# Allegro board TKA13_CORE_BOARD.brd
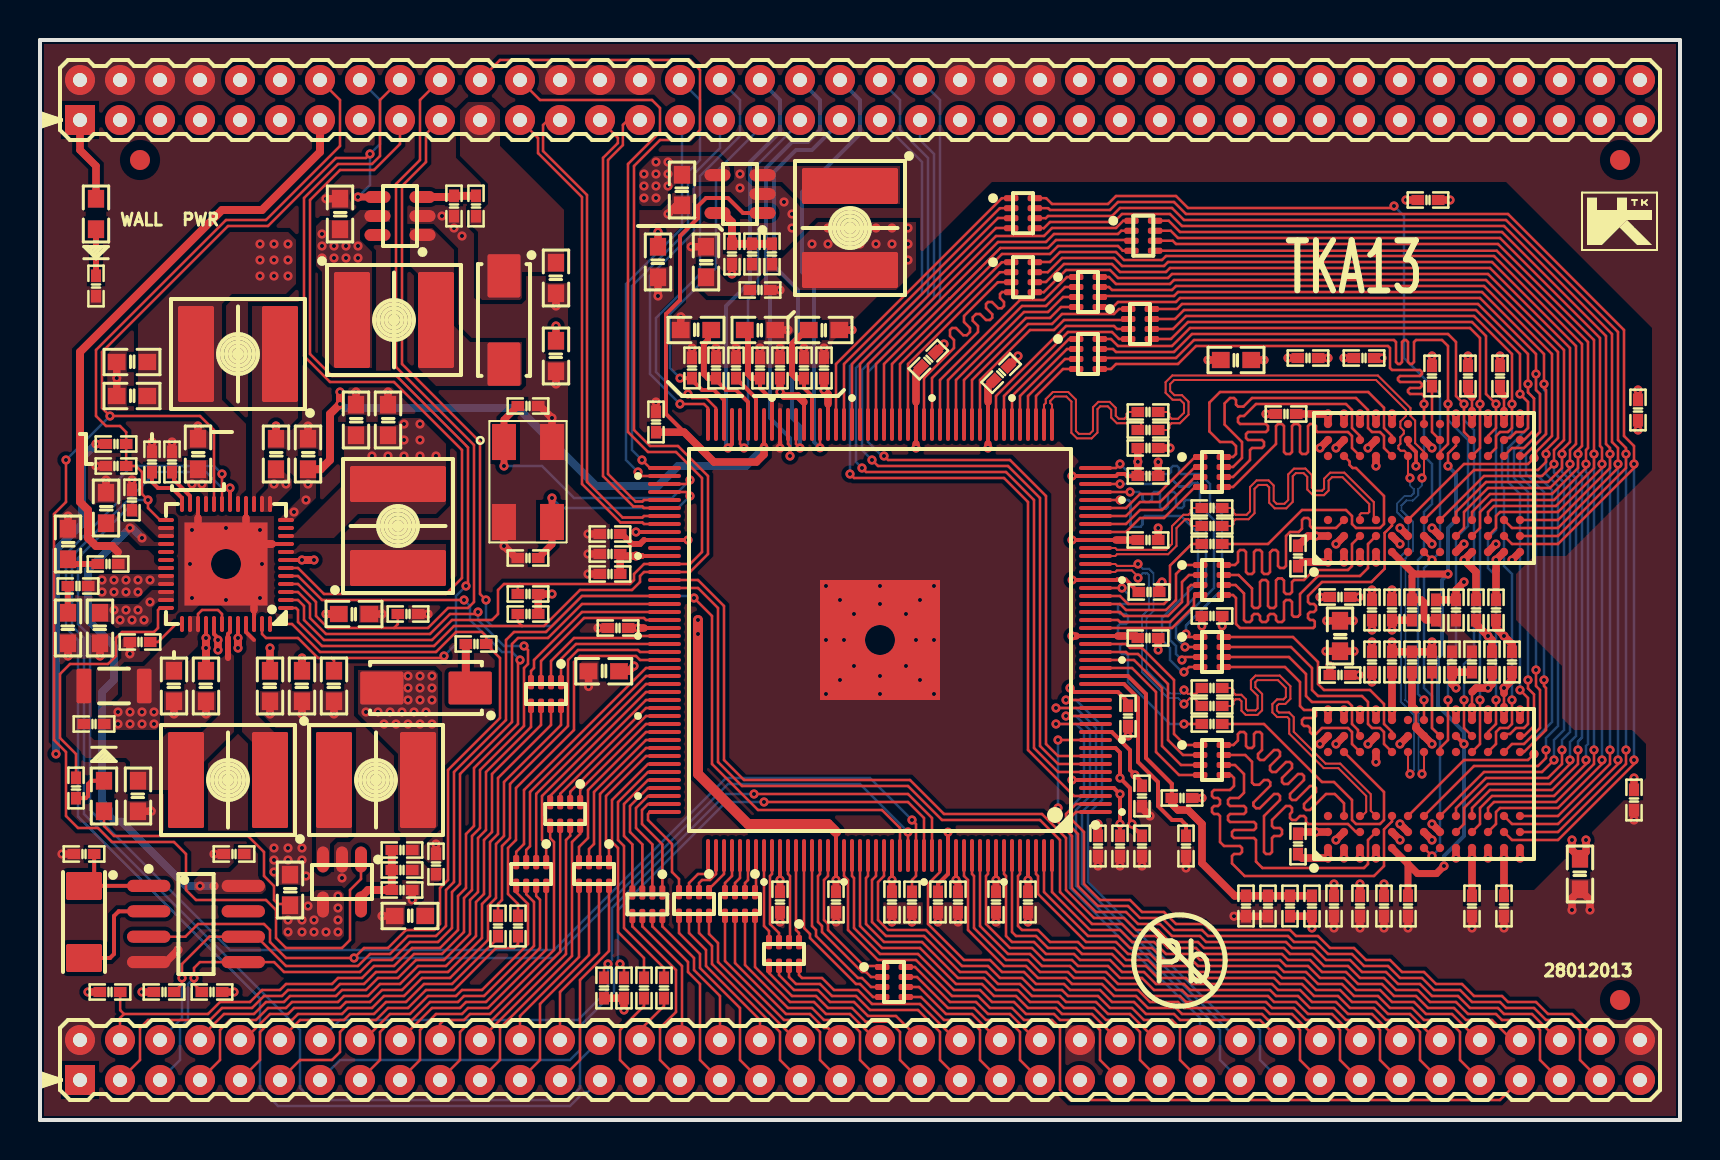
[diagram p0: board, top side]
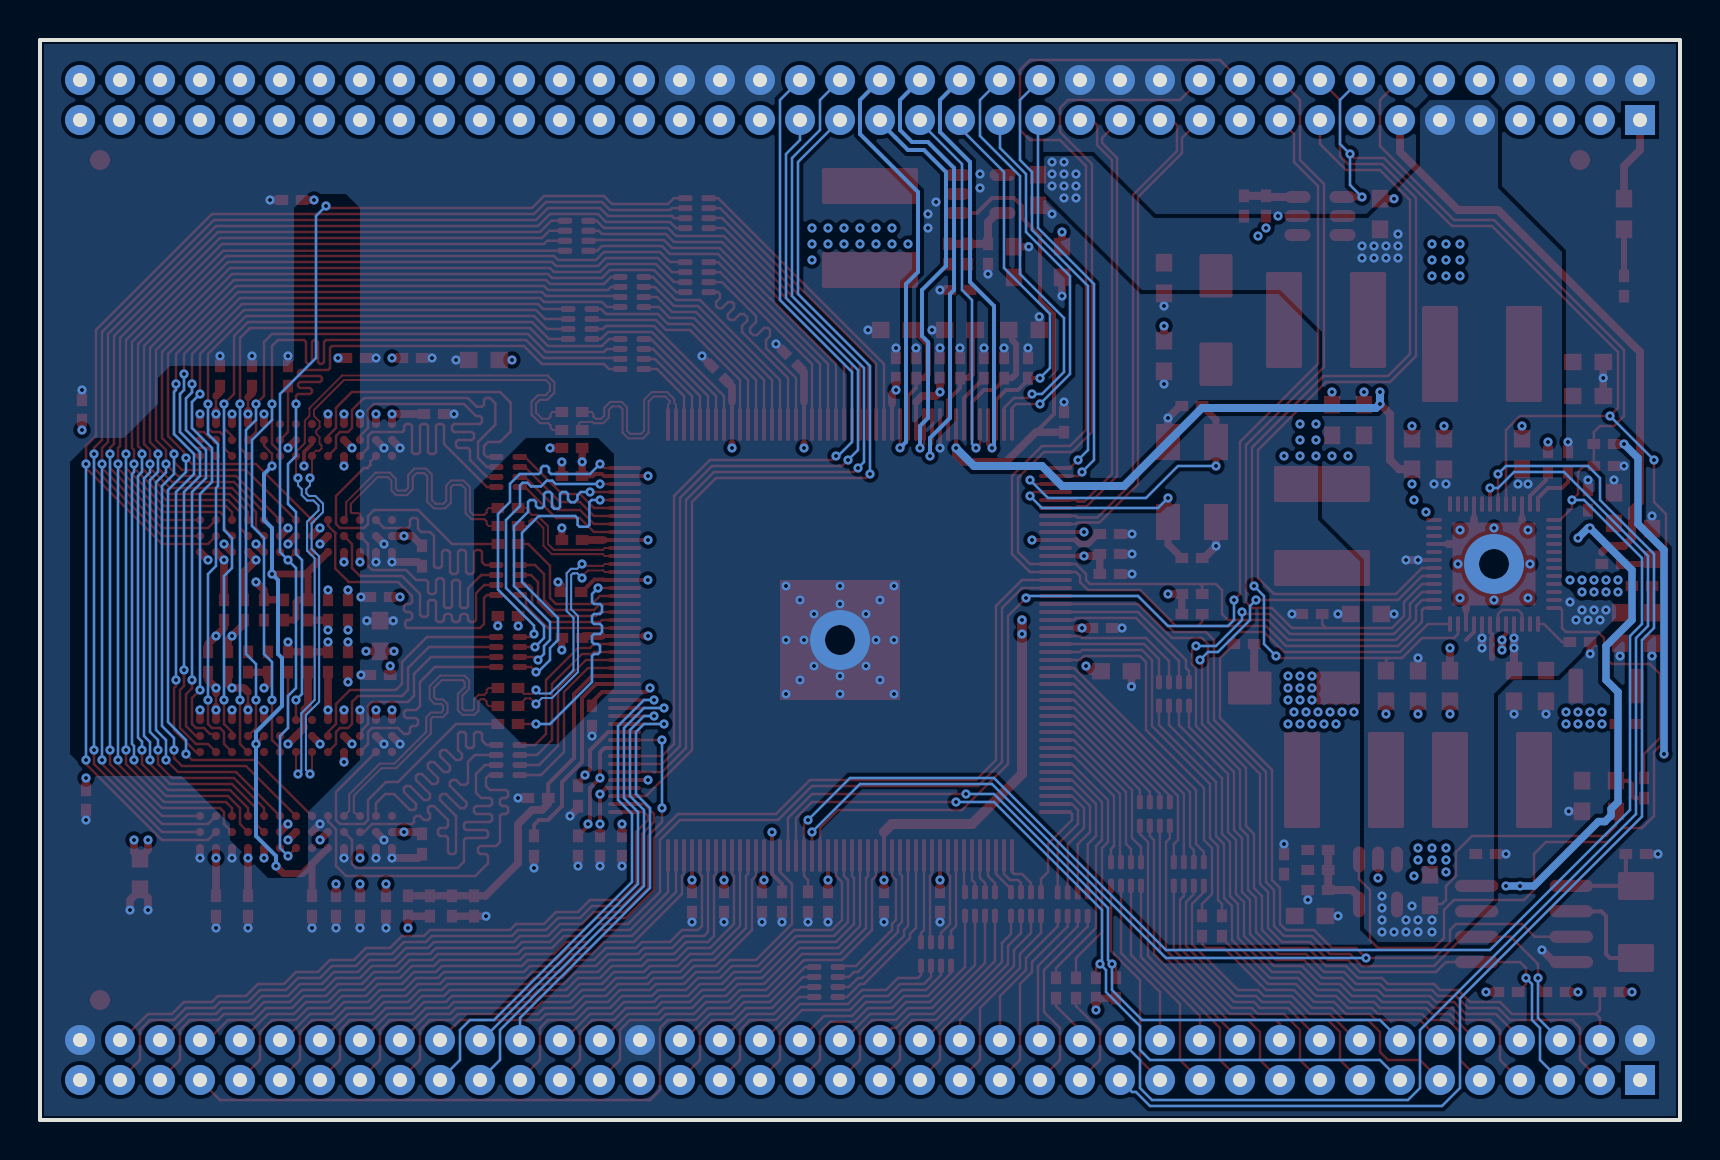
[diagram p1: board, bottom side, seen from below]

Outline 82 x 54 mm; copper layers: TOP, GND, PWR, BOTTOM. Coordinates in mm from the lower left corner of the outline.
Outline path: 0,54 82,54 82,0 0,0 0,54

## Design rules (mm)
net group A7: nets A7 DDR3_A7
net group A9: nets A9 DDR3_A9
net group D0: nets D0 DDR3_D0
net group D1: nets D1 DDR3_D1
net group D2: nets D2 DDR3_D2
net group D3: nets D3 DDR3_D3
net group D4: nets D4 DDR3_D4
net group D5: nets D5 DDR3_D5
net group D6: nets D6 DDR3_D6
net group D7: nets D7 DDR3_D7
net group D8: nets D8 DDR3_D8
net group D9: nets D9 DDR3_D9
net group D10: nets D10 DDR3_D10
net group D11: nets D11 DDR3_D11
net group D12: nets D12 DDR3_D12
net group D13: nets D13 DDR3_D13
net group D14: nets D14 DDR3_D14
net group D15: nets D15 DDR3_D15
net group DDR3_DM0: nets DDR3_DM0 DM0
net group DDR3_DM1: nets DDR3_DM1 DM1
net group DDR3_DQS0: nets DDR3_DQS0 DQS0
net group DDR3_DQS0_N: nets DDR3_DQS0_N DQS0_N
net group DDR3_DQS1: nets DDR3_DQS1 DQS1
net group DDR3_DQS1_N: nets DDR3_DQS1_N DQS1_N
net group DDR3_ODT: nets DDR3_ODT ODT
net group DDR3_RST: nets DDR3_RST RSTN
net group DIFF_DDR3_CLK: nets DDR3_CLK DDR3_CLK_N
net group DIFF_USB0: nets UDM0 UDP0
net group DIFF_USB1: nets UDM1 UDP1

## Placement (name value [footprint] x y rotation side)
C1  100n  [0402]  68.4 10.7 270 top
C2  100n  [0402]  68.6 25.5 270 top
C3  100n  [0402]  57.1 16.1 0 top
C4  100n  [0402]  55.4 24.1 0 top
C5  100n  [0402]  55.45 26.4 0 top
C6  100n  [0402]  55.4 32.2 0 top
C7  100n  [0402]  48.06 37.34 45 top
C8  100n  [0402]  44.42 38.02 45 top
C9  100n  [0402]  55.4 29 0 top
C10  100n  [0402]  58.6 25.2 0 top
C11  100n  [0402]  55.4 33.6 0 top
C12  100n  [0402]  69.4 46 0 top
C13  100n  [0402]  79.9 35.5 90 top
C14  100n  [0402]  79.7 16 270 top
C15  10u  [0603]  77 12.3 270 top
C16  100n  [0402]  62.9 13.8 270 top
C17  100n  [0402]  66 10.7 270 top
C18  100n  [0402]  67.2 10.7 270 top
C19  100n  [0402]  71.6 10.7 270 top
C20  100n  [0402]  73.2 10.7 270 top
C21  100n  [0402]  65 22.25 0 top
C22  100n  [0402]  66.6 22.9 90 top
C23  100n  [0402]  67.6 22.9 90 top
C24  100n  [0402]  72.6 22.9 90 top
C25  100n  [0402]  73.6 22.9 90 top
C26  100n  [0402]  62.9 28.2 270 top
C27  100n  [0402]  66.6 25.5 270 top
C28  100n  [0402]  67.6 25.5 270 top
C29  100n  [0402]  71.8 25.5 270 top
C30  100n  [0402]  72.8 25.5 270 top
C31  100n  [0402]  66.2 38.1 180 top
C32  100n  [0402]  63.4 38.1 180 top
C33  100n  [0402]  68.6 22.9 90 top
C34  100n  [0402]  62.3 35.3 180 top
C35  100n  [0402]  69.8 25.5 270 top
C36  100n  [0402]  70.6 22.9 270 top
C37  100n  [0402]  64.7 10.7 270 top
C38  100n  [0402]  65 26.15 0 top
C39  100n  [0402]  60.3 10.7 270 top
C40  100n  [0402]  62.5 10.7 90 top
C41  100n  [0402]  54.4 20.2 270 top
C42  100n  [0402]  55.1 16.2 270 top
C43  100n  [0402]  55.1 13.7 270 top
C44  100n  [0402]  54 13.7 270 top
C45  100n  [0402]  42.6 10.9 270 top
C46  100n  [0402]  47.8 10.9 270 top
C47  100n  [0402]  45.9 10.9 270 top
C48  100n  [0402]  49.4 10.9 270 top
C49  100n  [0402]  71.4 37.2 90 top
C50  100n  [0402]  73 37.2 90 top
C51  100n  [0402]  39.2 37.6 90 top
C52  100n  [0402]  28.5 29.3 180 top
C53  100n  [0402]  28.9 24.6 180 top
C54  100n  [0402]  39.8 10.9 270 top
C55  10u  [0603]  28.19 22.44 180 top
C56  10u  [0603]  25.8 38.2 270 top
C57  33p  [0402]  24.4 35.7 0 top
C58  33p  [0402]  24.4 28.1 180 top
C59  10u  [0603]  30.9 42.9 270 top
C60  100n  [0402]  28.5 28.3 180 top
C61  100n  [0402]  37 10.9 270 top
C62  100n  [0402]  44.9 10.9 270 top
C63  100n  [0402]  52.9 13.7 270 top
C64  10u  [0603]  4.9 16.2 270 top
C65  1u  [0402]  2.7 19.8 0 top
C66  10u  [0603]  6.7 21.7 270 top
C67  10u  [0603]  13.1 21.7 270 top
C68  10u  [0603]  15.7 25.3 0 top
C69  10u  [0603]  17.4 35 90 top
C70  1n  [0603]  15.8 35 90 top
C71  10u  [0603]  4.6 36.2 180 top
C72  1n  [0603]  4.6 37.9 180 top
C73  10u  [0603]  11.8 33.3 90 top
C74  10u  [0603]  8.3 21.7 270 top
C75  10u  [0603]  11.5 21.7 270 top
C76  10u  [0603]  3.3 30.6 90 top
C77  10u  [0603]  13.4 33.3 90 top
C78  10u  [0603]  3 24.6 270 top
C79  10u  [0603]  1.4 24.6 270 top
C80  10u  [0603]  1.4 28.8 90 top
C81  1u  [0402]  4.6 31 90 top
C82  1u  [0402]  5.6 32.9 90 top
C83  10u  [0603]  7.9 33.3 90 top
C84  1n  [0603]  14.7 21.7 270 top
C85  100n  [0402]  36 41.5 0 top
C86  10u  [0603]  33.3 42.9 90 top
C87  47p  [0402]  36.6 43.3 90 top
C88  10u  [0603]  32.1 46.5 270 top
C89  100n  [0402]  19.8 12.8 90 top
C90  10u  [0603]  18.5 10.2 180 top
C91  47p  [0402]  18.1 13.5 180 top
C92  10u  [0603]  12.5 11.5 90 top
C93  10u  [0603]  25.8 42.1 270 top
C94  10u  [0603]  15 45.3 90 top
C95  10p  [0402]  2.2 13.3 180 top
C96  100n  [0402]  9.7 13.3 180 top
C97  100n  [0402]  28.5 27.3 180 top
C98  10u  [0603]  36 39.5 0 top
C99  100n  [0402]  36 37.6 90 top
C100  1u  [0402]  34.8 37.6 90 top
C101  10u  [0603]  32.8 39.5 180 top
C102  100n  [0402]  33.8 37.6 90 top
C103  100n  [0402]  37 37.6 90 top
C104  10u  [0603]  39.2 39.5 0 top
C105  100n  [0402]  38.2 37.6 90 top
C106  1n  [0402]  32.6 37.6 90 top
C107  100n  [0402]  30.8 34.9 90 top
C108  1u  [0402]  3.8 32.7 180 top
C109  100n  [0402]  43.6 10.9 270 top
C110  10u  [0603]  59.8 38 0 top
C111  10u  [0603]  65 24.2 90 top
D1  -  [SS14]  23.2 40 270 top
D2  -  [SS14]  19.3 21.6 180 top
J1  CON40X2  [HDR200M-2X40-MOD]  2 2 0 top
J2  CON40X2  [HDR200M-2X40-MOD]  2 50 0 top
L1  PULSE-P1172-22uH-3,8A  [COIL_4U7H]  9.4 17 180 top
L2  PULSE-P1172-22uH-3,8A  [COIL_4U7H]  17.9 29.7 90 top
L3  PULSE-P1172-22uH-3,8A  [COIL_4U7H]  9.9 38.3 180 top
L4  PULSE-P1172-22uH-3,8A  [COIL_4U7H]  40.5 44.6 270 top
L5  PULSE-P1172-22uH-3,8A  [COIL_4U7H]  16.8 17 0 top
L6  PULSE-P1172-22uH-3,8A  [COIL_4U7H]  17.7 40 0 top
LED1  GREEN  [LED0603]  3.2 16.2 270 top
LED2  GREEN  [LED0603]  2.8 45.3 90 top
NOREF  -  [unnamed]  79 6 0 top
NOREF#2  -  [#2]  57.1 8.1 0 top
NOREF#3  -  [#2]  0 58 0 top
NOREF#4  -  [unnamed]  5 48 0 top
NOREF#5  -  [unnamed]  79 48 0 top
NOREF#6  -  [#2]  77.1 43.5 0 top
NOREF#7  -  [#2]  -166.6 -115.2 0 top
NOREF#8  -  [#2]  86 0 90 top
R1  240R 1%  [0402]  69.6 22.9 90 top
R2  240R 1%  [0402]  69.6 37.2 90 top
R3  22R  [0402]  55.4 35.4 0 top
R4  22R  [0402]  55.4 34.5 0 top
R5  22R  [0402]  58.6 21.6 0 top
R6  22R  [0402]  58.6 20.7 0 top
R7  22R  [0402]  58.6 30.6 0 top
R8  22R  [0402]  58.6 29.7 0 top
R9  240R 1%  [0402]  57.3 13.7 270 top
R10  22R  [0402]  58.6 19.8 0 top
R11  22R  [0402]  58.6 28.8 0 top
R12  2K 1%  [0402]  70.8 25.5 270 top
R13  2K 1%  [0402]  71.6 22.9 270 top
R14  2K 1%  [0402]  63.6 10.7 90 top
R15  2K 1%  [0402]  61.4 10.7 270 top
R16  0.03R 1%  [1206]  3.7 21.7 0 top
R17  240R 1%  [0402]  5 23.9 180 top
R18  1R  [0402]  1.9 26.7 180 top
R19  1R  [0402]  3.4 27.8 180 top
R20  2K2  [0402]  1.8 16.6 270 top
R21  200K 1%  [0402]  6.6 32.9 90 top
R22  2K2  [0402]  18.4 25.3 0 top
R23  2K2  [0402]  24.4 26.3 0 top
R24  2K2  [0402]  24.4 25.3 0 top
R25  150K 1%  [0402]  35.6 43.3 90 top
R26  100K 1%  [0402]  34.6 43.3 270 top
R27  442K 1%  [0402]  18.1 12.5 180 top
R28  100K 1%  [0402]  18.1 11.5 0 top
R29  100K 1%  [0402]  21.8 45.7 90 top
R30  13K7 1%  [0402]  20.7 45.7 270 top
R31  2K2  [0402]  6.2 6.4 180 top
R32  2K2  [0402]  8.6 6.4 0 top
R33  2K2  [0402]  28.2 6.6 270 top
R34  2K2  [0402]  29.2 6.6 270 top
R35  47K  [0402]  21.8 23.8 0 top
R36  22R  [0402]  31.2 6.6 270 top
R37  22R  [0402]  30.2 6.6 270 top
R38  22R  [0402]  23.9 9.7 270 top
R39  22R  [0402]  22.9 9.7 270 top
R40  47K  [0402]  3.8 33.8 0 top
R41  47K  [0402]  3.5 6.4 0 top
R42  470R  [0402]  2.8 41.7 270 top
RN1  22R  [EXBN8V]  58.6 18 0 top
RN2  22R  [EXBN8V]  58.6 23.4 0 top
RN3  22R  [EXBN8V]  58.6 32.4 0 top
RN4  22R  [EXBN8V]  58.6 27 0 top
RN5  22R  [EXBN8V]  49.15 42.14 0 top
RN6  22R  [EXBN8V]  55 39.8 0 top
RN7  22R  [EXBN8V]  52.4 38.3 0 top
RN8  22R  [EXBN8V]  55.16 44.21 0 top
RN9  22R  [EXBN8V]  52.4 41.4 0 top
RN10  22R  [EXBN8V]  49.15 45.34 0 top
RN11  22R  [EXBN8V]  42.7 6.9 0 top
RN12  22R  [EXBN8V]  37.2 8.3 270 top
RN13  22R  [EXBN8V]  35 10.8 270 top
RN14  22R  [EXBN8V]  32.7 10.8 270 top
RN15  22R  [EXBN8V]  30.37 10.79 270 top
RN16  22R  [EXBN8V]  27.7 12.3 270 top
RN17  22R  [EXBN8V]  26.26 15.3 270 top
RN18  22R  [EXBN8V]  24.56 12.3 270 top
RN19  22R  [EXBN8V]  25.3 21.3 270 top
U1  -  [A13]  42 24 180 top
U2  H5TQ2G83CFR-H9C  [FBGA78]  69.2 16.8 90 top
U3  H5TQ2G83CFR-H9C  [FBGA78]  69.2 31.6 90 top
U4  -  [AXP209]  9.3 27.8 180 top
U5  SY8008B  [SOT23-5]  35 46.3 90 top
U6  SY8008B  [SOT23-5]  15.1 11.9 180 top
U7  SY7208ABC  [SSOT23-6]  18 45.2 90 top
U8  PCF8563T/5  [AT24C04]  7.8 9.8 270 top
Y1  24MHz  [XTAL50X320X110N_MOD]  24.4 31.9 270 top
Y2  32.768KHz  [ABS10MOD]  2.2 9.9 270 top

## Library data of the parts
C1-C111 = CAPACITOR_1
D1 D2 = DIODE SCHOTTKY_1: User Part Number: pn; Tolerance: RichardLC
J1 J2 = CONNECTOR EDGE 40X2: User Part Number: pn; Tolerance: RichardLC
L1-L6 = PULSE-P1172-22uH-3,8A: User Part Number: pn; Tolerance: RichardLC
LED1 LED2 = LED_2
R1-R4 R9 R12-R15 R17-R42 = R_0
R5-R8 R10 R11 = R_0: signal model: R_0_0402_22R_22R
R16 = R_0: User Part Number: pn; Tolerance: RichardLC
RN1-RN4 RN10 = 744-083/SM: User Part Number: pn; Tolerance: RichardLC; signal model: 744-083/SM_EXBN8V_22R_22R
RN5-RN9 RN11-RN19 = 744-083/SM: User Part Number: pn; Tolerance: RichardLC
U1 = A13_14: User Part Number: pn; Tolerance: RichardLC
U2 U3 = H5TQ2G83CFR-H9C_0: User Part Number: pn; Tolerance: RichardLC
U4 = AXP209_5: User Part Number: pn; Tolerance: RichardLC
U5 U6 = SY8008B_0: User Part Number: pn; Tolerance: RichardLC
U7 = SY7208ABC_1: User Part Number: pn; Tolerance: RichardLC
U8 = PCF8563T: User Part Number: pn; Tolerance: RichardLC
Y1 = ZTA_0
Y2 = ZTA: User Part Number: pn; Tolerance: RichardLC

## Footprints (pads in the part's own frame, mm; a bottom-side part is the same pattern mirrored in y, then rotated)
0402
  rect 0.635x0.508 smd: 1(-0.508,0) 2(0.508,0)
0603
  rect 0.889x0.813 smd: 1(-0.762,0) 2(0.762,0)
1206
  custom 0.73x1.73 smd: 1(-1.51,0) 2(1.51,0)
A13
  oval 1.65x0.2 smd: 1(-10.775,8.6) 2(-10.775,8.2) 3(-10.775,7.8) 4(-10.775,7.4) 5(-10.775,7) 6(-10.775,6.6) 7(-10.775,6.2) 8(-10.775,5.8) 9(-10.775,5.4) 10(-10.775,5) 11(-10.775,4.6) 12(-10.775,4.2) 13(-10.775,3.8) 14(-10.775,3.4) 15(-10.775,3) 16(-10.775,2.6) 17(-10.775,2.2) 18(-10.775,1.8) 19(-10.775,1.4) 20(-10.775,1) 21(-10.775,0.6) 22(-10.775,0.2) 23(-10.775,-0.2) 24(-10.775,-0.6) 25(-10.775,-1) 26(-10.775,-1.4) 27(-10.775,-1.8) 28(-10.775,-2.2) 29(-10.775,-2.6) 30(-10.775,-3) 31(-10.775,-3.4) 32(-10.775,-3.8) 33(-10.775,-4.2) 34(-10.775,-4.6) 35(-10.775,-5) 36(-10.775,-5.4) 37(-10.775,-5.8) 38(-10.775,-6.2) 39(-10.775,-6.6) 40(-10.775,-7) 41(-10.775,-7.4) 42(-10.775,-7.8) 43(-10.775,-8.2) 44(-10.775,-8.6) 89(10.775,-8.6) 90(10.775,-8.2) 91(10.775,-7.8) 92(10.775,-7.4) 93(10.775,-7) 94(10.775,-6.6) 95(10.775,-6.2) 96(10.775,-5.8) 97(10.775,-5.4) 98(10.775,-5) 99(10.775,-4.6) 100(10.775,-4.2) 101(10.775,-3.8) 102(10.775,-3.4) 103(10.775,-3) 104(10.775,-2.6) 105(10.775,-2.2) 106(10.775,-1.8) 107(10.775,-1.4) 108(10.775,-1) 109(10.775,-0.6) 110(10.775,-0.2) 111(10.775,0.2) 112(10.775,0.6) 113(10.775,1) 114(10.775,1.4) 115(10.775,1.8) 116(10.775,2.2) 117(10.775,2.6) 118(10.775,3) 119(10.775,3.4) 120(10.775,3.8) 121(10.775,4.2) 122(10.775,4.6) 123(10.775,5) 124(10.775,5.4) 125(10.775,5.8) 126(10.775,6.2) 127(10.775,6.6) 128(10.775,7) 129(10.775,7.4) 130(10.775,7.8) 131(10.775,8.2) 132(10.775,8.6)
  oval 0.2x1.65 smd: 45(-8.6,-10.775) 46(-8.2,-10.775) 47(-7.8,-10.775) 48(-7.4,-10.775) 49(-7,-10.775) 50(-6.6,-10.775) 51(-6.2,-10.775) 52(-5.8,-10.775) 53(-5.4,-10.775) 54(-5,-10.775) 55(-4.6,-10.775) 56(-4.2,-10.775) 57(-3.8,-10.775) 58(-3.4,-10.775) 59(-3,-10.775) 60(-2.6,-10.775) 61(-2.2,-10.775) 62(-1.8,-10.775) 63(-1.4,-10.775) 64(-1,-10.775) 65(-0.6,-10.775) 66(-0.2,-10.775) 67(0.2,-10.775) 68(0.6,-10.775) 69(1,-10.775) 70(1.4,-10.775) 71(1.8,-10.775) 72(2.2,-10.775) 73(2.6,-10.775) 74(3,-10.775) 75(3.4,-10.775) 76(3.8,-10.775) 77(4.2,-10.775) 78(4.6,-10.775) 79(5,-10.775) 80(5.4,-10.775) 81(5.8,-10.775) 82(6.2,-10.775) 83(6.6,-10.775) 84(7,-10.775) 85(7.4,-10.775) 86(7.8,-10.775) 87(8.2,-10.775) 88(8.6,-10.775) 133(8.6,10.775) 134(8.2,10.775) 135(7.8,10.775) 136(7.4,10.775) 137(7,10.775) 138(6.6,10.775) 139(6.2,10.775) 140(5.8,10.775) 141(5.4,10.775) 142(5,10.775) 143(4.6,10.775) 144(4.2,10.775) 145(3.8,10.775) 146(3.4,10.775) 147(3,10.775) 148(2.6,10.775) 149(2.2,10.775) 150(1.8,10.775) 151(1.4,10.775) 152(1,10.775) 153(0.6,10.775) 154(0.2,10.775) 155(-0.2,10.775) 156(-0.6,10.775) 157(-1,10.775) 158(-1.4,10.775) 159(-1.8,10.775) 160(-2.2,10.775) 161(-2.6,10.775) 162(-3,10.775) 163(-3.4,10.775) 164(-3.8,10.775) 165(-4.2,10.775) 166(-4.6,10.775) 167(-5,10.775) 168(-5.4,10.775) 169(-5.8,10.775) 170(-6.2,10.775) 171(-6.6,10.775) 172(-7,10.775) 173(-7.4,10.775) 174(-7.8,10.775) 175(-8.2,10.775) 176(-8.6,10.775)
  rect 6x6 smd: 177(0,0)
ABS10MOD
  custom 1.4x1.8 smd: 1(-1.8,0) 2(1.8,0)
AT24C04
  oval 0.608x2.17 smd: 1(-1.905,-2.365) 2(-0.635,-2.365) 3(0.635,-2.365) 4(1.905,-2.365) 5(1.905,2.365) 6(0.635,2.365) 7(-0.635,2.365) 8(-1.905,2.365)
AXP209
  custom 0.8x0.2 smd: 1(-3,2.2) 2(-3,1.8) 3(-3,1.4) 4(-3,1) 5(-3,0.6) 6(-3,0.2) 7(-3,-0.2) 8(-3,-0.6) 9(-3,-1) 10(-3,-1.4) 11(-3,-1.8) 12(-3,-2.2) 25(3,-2.2) 26(3,-1.8) 27(3,-1.4) 28(3,-1) 29(3,-0.6) 30(3,-0.2) 31(3,0.2) 32(3,0.6) 33(3,1) 34(3,1.4) 35(3,1.8) 36(3,2.2)
  custom 0.2x0.8 smd: 13(-2.2,-3) 14(-1.8,-3) 15(-1.4,-3) 16(-1,-3) 17(-0.6,-3) 18(-0.2,-3) 19(0.2,-3) 20(0.6,-3) 21(1,-3) 22(1.4,-3) 23(1.8,-3) 24(2.2,-3) 37(2.2,3) 38(1.8,3) 39(1.4,3) 40(1,3) 41(0.6,3) 42(0.2,3) 43(-0.2,3) 44(-0.6,3) 45(-1,3) 46(-1.4,3) 47(-1.8,3) 48(-2.2,3)
  rect 4.15x4.15 smd: EPAD(0,0)
COIL_4U7H
  custom 1.8x4.8 smd: 1(-2.1,0) 2(2.1,0)
EXBN8V
  custom 0.72x0.3 smd: 1(-0.59,0.75) 2(-0.59,0.25) 3(-0.59,-0.25) 4(-0.59,-0.75) 5(0.59,-0.75) 6(0.59,-0.25) 7(0.59,0.25) 8(0.59,0.75)
FBGA78
  round 0.413 smd: A1(-3.2,4.8) A2(-2.4,4.8) A3(-1.6,4.8) A7(1.6,4.8) A8(2.4,4.8) A9(3.2,4.8) B1(-3.2,4) B2(-2.4,4) B3(-1.6,4) B7(1.6,4) B8(2.4,4) B9(3.2,4) C1(-3.2,3.2) C2(-2.4,3.2) C3(-1.6,3.2) C7(1.6,3.2) C8(2.4,3.2) C9(3.2,3.2) D1(-3.2,2.4) D2(-2.4,2.4) D3(-1.6,2.4) D7(1.6,2.4) D8(2.4,2.4) D9(3.2,2.4) E1(-3.2,1.6) E2(-2.4,1.6) E3(-1.6,1.6) E7(1.6,1.6) E8(2.4,1.6) E9(3.2,1.6) F1(-3.2,0.8) F2(-2.4,0.8) F3(-1.6,0.8) F7(1.6,0.8) F8(2.4,0.8) F9(3.2,0.8) G1(-3.2,0) G2(-2.4,0) G3(-1.6,0) G7(1.6,0) G8(2.4,0) G9(3.2,0) H1(-3.2,-0.8) H2(-2.4,-0.8) H3(-1.6,-0.8) H7(1.6,-0.8) H8(2.4,-0.8) H9(3.2,-0.8) J1(-3.2,-1.6) J2(-2.4,-1.6) J3(-1.6,-1.6) J7(1.6,-1.6) J8(2.4,-1.6) J9(3.2,-1.6) K1(-3.2,-2.4) K2(-2.4,-2.4) K3(-1.6,-2.4) K7(1.6,-2.4) K8(2.4,-2.4) K9(3.2,-2.4) L1(-3.2,-3.2) L2(-2.4,-3.2) L3(-1.6,-3.2) L7(1.6,-3.2) L8(2.4,-3.2) L9(3.2,-3.2) M1(-3.2,-4) M2(-2.4,-4) M3(-1.6,-4) M7(1.6,-4) M8(2.4,-4) M9(3.2,-4) N1(-3.2,-4.8) N2(-2.4,-4.8) N3(-1.6,-4.8) N7(1.6,-4.8) N8(2.4,-4.8) N9(3.2,-4.8)
HDR200M-2X40-MOD
  rect 1.5x1.5 hole 0.7: 1(0,0)
  round 1.5 hole 0.7: 2(0,2) 3(2,0) 4(2,2) 5(4,0) 6(4,2) 7(6,0) 8(6,2) 9(8,0) 10(8,2) 11(10,0) 12(10,2) 13(12,0) 14(12,2) 15(14,0) 16(14,2) 17(16,0) 18(16,2) 19(18,0) 20(18,2) 21(20,0) 22(20,2) 23(22,0) 24(22,2) 25(24,0) 26(24,2) 27(26,0) 28(26,2) 29(28,0) 30(28,2) 31(30,0) 32(30,2) 33(32,0) 34(32,2) 35(34,0) 36(34,2) 37(36,0) 38(36,2) 39(38,0) 40(38,2) 41(40,0) 42(40,2) 43(42,0) 44(42,2) 45(44,0) 46(44,2) 47(46,0) 48(46,2) 49(48,0) 50(48,2) 51(50,0) 52(50,2) 53(52,0) 54(52,2) 55(54,0) 56(54,2) 57(56,0) 58(56,2) 59(58,0) 60(58,2) 61(60,0) 62(60,2) 63(62,0) 64(62,2) 65(64,0) 66(64,2) 67(66,0) 68(66,2) 69(68,0) 70(68,2) 71(70,0) 72(70,2) 73(72,0) 74(72,2) 75(74,0) 76(74,2) 77(76,0) 78(76,2) 79(78,0) 80(78,2)
LED0603
  rect 0.889x0.813 smd: 1(-0.762,0) 2(0.762,0)
SOT23-5
  oval 0.6x1.3 smd: 1(-0.95,-1.125) 2(0,-1.125) 3(0.95,-1.125) 4(0.95,1.125) 5(-0.95,1.125)
SS14
  custom 2.17x1.65 smd: A(2.21,0) C(-2.21,0)
SSOT23-6
  oval 0.6x1.3 smd: 1(-0.95,-1.125) 2(0,-1.125) 3(0.95,-1.125) 4(0.95,1.125) 5(0,1.125) 6(-0.95,1.125)
unnamed
  round 1 smd: (0,0)
XTAL50X320X110N_MOD
  rect 1.803x1.194 smd: 1(-2,-1.2) 2(2,-1.2) 3(2,1.2) 4(-2,1.2)

## Nets
AVCC_3V: C77.1 C107.1 J2.10 J2.12 U1.81(AVCC) U4.12(LDO2) U5.1(EN)
GND: C1.2 C2.2 C3.2 C4.2 C5.2 C6.2 C7.2 C8.2 C9.2 C10.2 C11.2 C12.2 C13.2 C14.2 C15.2 C16.2 C17.2 C18.2 C19.2 C20.2 C21.2 C22.2 C23.2 C24.2 C25.2 C26.2 C27.2 C28.2 C29.2 C30.2 C31.2 C32.2 C33.2 C34.2 C36.2 C37.2 C38.2 C39.2 C41.2 C42.2 C43.2 C44.2 C45.2 C46.2 C47.2 C48.2 C49.2 C50.2 C51.2 C52.2 C53.2 C54.2 C55.2 C56.2 C57.2 C58.2 C59.2 C60.2 C61.2 C62.2 C63.2 C64.2 C66.2 C67.2 C68.2 C69.2 C70.2 C71.2 C72.2 C73.2 C74.2 C75.2 C76.2 C77.2 C78.2 C79.2 C80.2 C81.2 C82.2 C83.2 C84.2 C85.2 C86.2 C88.2 C89.2 C90.2 C92.2 C93.2 C94.2 C95.2 C96.2 C97.2 C98.2 C99.2 C100.2 C101.2 C102.2 C103.2 C104.2 C105.2 C106.2 C107.2 C108.2 C109.2 C110.2 C111.2 J1.2 J1.52 J1.80 J2.2 J2.4 J2.6 J2.8 J2.26 J2.28 J2.30 J2.46 J2.48 J2.50 R1.2 R2.2 R9.2 R13.2 R15.2 R17.2 R21.2 R22.2 R26.2 R28.2 R30.2 R42.2 U1.79(AGND) U1.177(GND) U2.A1(VSS1) U2.A8(VSS2) U2.B1(VSS3) U2.B2(VSSQ1) U2.B8(VSSQ2) U2.C9(VSSQ3) U2.D1(VSSQ4) U2.D8(VSS4) U2.D9(VSSQ5) U2.F2(VSS5) U2.F8(VSS6) U2.H2(C\S\) U2.J1(VSS7) U2.J9(VSS8) U2.L1(VSS9) U2.L9(VSS10) U2.N1(VSS11) U2.N9(VSS12) U3.A1(VSS1) U3.A8(VSS2) U3.B1(VSS3) U3.B2(VSSQ1) U3.B8(VSSQ2) U3.C9(VSSQ3) U3.D1(VSSQ4) U3.D8(VSS4) U3.D9(VSSQ5) U3.F2(VSS5) U3.F8(VSS6) U3.H2(C\S\) U3.J1(VSS7) U3.J9(VSS8) U3.L1(VSS9) U3.L9(VSS10) U3.N1(VSS11) U3.N9(VSS12) U4.9(PGND2) U4.16(PGND3) U4.22(AGND) U4.46(PGND1) U4.EPAD U5.2(GND) U6.2(GND) U7.2(GND) U8.4(VSS) Y1.2 Y1.4
VCC_3V3: C59.1 C60.1 C61.1 C62.1 C63.1 C89.1 C90.1 C91.1 C97.1 C103.1 D2.A J1.1 J1.51 J1.79 J2.45 J2.47 J2.49 L5.2 R23.2 R24.2 R27.1 R31.2 R32.2 R33.2 R34.2 R40.1 R41.1 U1.5(VCC1) U1.76(V33_HP) U1.97(V33_USB) U1.100(VCC2) U1.142(VCC3) U1.163(VCC4)
VCC_DRAM: C4.1 C5.1 C6.1 C7.1 C8.1 C10.1 C11.1 C12.1 C13.1 C14.1 C15.1 C16.1 C17.1 C18.1 C19.1 C20.1 C21.1 C22.1 C23.1 C24.1 C25.1 C26.1 C27.1 C28.1 C29.1 C30.1 C31.1 C32.1 C33.1 C34.1 C35.1 C37.1 C38.1 C40.1 C49.1 C50.1 C85.1 C86.1 C87.1 C110.1 C111.1 L4.2 R12.1 R14.1 R25.1 U1.23(VCC1_DRAM) U1.30(VCC2_DRAM) U1.43(VCC3_DRAM) U1.53(VCC4_DRAM) U1.62(VCC5_DRAM) U2.A2(VDD1) U2.A9(VDD2) U2.B9(VDDQ1) U2.C1(VDDQ2) U2.D7(VDD3) U2.E2(VDDQ3) U2.E9(VDDQ4) U2.G2(VDD4) U2.G8(VDD5) U2.K1(VDD6) U2.K9(VDD7) U2.M1(VDD8) U2.M9(VDD9) U3.A2(VDD1) U3.A9(VDD2) U3.B9(VDDQ1) U3.C1(VDDQ2) U3.D7(VDD3) U3.E2(VDDQ3) U3.E9(VDDQ4) U3.G2(VDD4) U3.G8(VDD5) U3.K1(VDD6) U3.K9(VDD7) U3.M1(VDD8) U3.M9(VDD9)
VDD_CPU: C41.1 C42.1 C43.1 C44.1 C45.1 C46.1 C47.1 C48.1 C69.1 C70.1 L2.2 U1.4(VDD1_CPU) U1.9(VDD2_PCU) U1.11(VDD3_CPU) U1.16(VDD4_CPU) U1.156(VDD5_CPU) U1.164(VDD6_CPU) U1.169(VDD7_CPU) U1.173(VDD8_CPU) U4.10(DCDC2)
VDD_INT: C9.1 C51.1 C52.1 C53.1 C54.1 C55.1 C56.1 C71.1 C72.1 L3.2 U1.35(VDD1_INT) U1.73(VDD2_INT) U1.98(VDD3_INT) U1.109(VDD4_INT) U1.149(VDD5_INT) U4.17(DCDC3)
VDD_RTC: C76.1 C96.1 U4.28(LDO1) U8.8(VDD)
VINT: C81.1 U4.26(VINT) U4.27(LDO1SET)
A0: RN5.8 U2.K3(A0) U3.K3(A0)
A1: RN6.6 U2.L7(A1) U3.L7(A1)
A2: RN8.6 U2.L3(A2) U3.L3(A2)
A3: RN8.5 U2.K2(A3) U3.K2(A3)
A4: RN6.5 U2.L8(A4) U3.L8(A4)
A5: RN8.7 U2.L2(A5) U3.L2(A5)
A6: RN6.7 U2.M8(A6) U3.M8(A6)
A7: RN10.7 U2.M2(A7) U3.M2(A7)
A8: RN6.8 U2.N8(A8) U3.N8(A8)
A9: RN10.5 U2.M3(A9) U3.M3(A9)
A10: RN7.6 U2.H7(A10/AP) U3.H7(A10/AP)
A11: RN9.5 U2.M7(A11) U3.M7(A11)
A12: RN7.8 U2.K7(A12/B\C\) U3.K7(A12/B\C\)
A13: RN8.8 U2.N3(A13) U3.N3(A13)
A14: RN9.6 U2.N7(A14) U3.N7(A14)
ACIN_5V: J2.1 J2.3 LED2.2(ANODE) R18.1 U4.32(ACIN1) U4.33(ACIN2)
BA0: RN5.7 U2.J2(BA0) U3.J2(BA0)
BA1: RN7.7 U2.K8(BA1) U3.K8(BA1)
BA2: RN5.6 U2.J3(BA2) U3.J3(BA2)
BAT: C65.2 C66.1 J2.5 J2.7 R16.2 U4.38(BAT1) U4.39(BAT2) U4.42(BATSENSE)
CASN: RN9.8 U2.G3(C\A\S\) U3.G3(C\A\S\)
CKE: RN7.5 U2.G9(CKE) U3.G9(CKE)
CLK: R4.2 U2.F7(CK) U3.F7(CK)
CLKN: R3.2 U2.G7(C\K\) U3.G7(C\K\)
CPU_CSI_D0: RN17.4 U1.118(CSI_D0/SDC2_D0)
CPU_CSI_D1: RN17.3 U1.119(CSI_D1/SDC2_D1)
CPU_CSI_D2: RN17.2 U1.120(CSI_D2/SDC2_D2)
CPU_CSI_D3: RN17.1 U1.121(CSI_D3/SDC2_D3)
CPU_CSI_D4: RN16.4 U1.122(CSI_D4/SDC2_CMD)
CPU_CSI_D5: RN16.3 U1.123(CSI_D5/SDC2_CLK)
CPU_CSI_D6: RN16.2 U1.124(CSI_D6/UART1_TX)
CPU_CSI_D7: RN16.1 U1.125(CSI_D7/UART1_RX)
CPU_CSI_HSYNC: RN18.2 U1.116(CSI_HSYNC/SPI2_MOSI)
CPU_CSI_MCLK: RN18.3 U1.115(CSI_MCLK/SPI2_CLK/EINT15)
CPU_CSI_PCLK: RN18.4 U1.114(CSI_PCLK/SPI2_CS0/EINT14)
CPU_CSI_VSYNC: RN18.1 U1.117(CSI_VSYNC/SPI2_MISO)
CPU_LCD_CLK: RN15.3 U1.129(LCD_CLK)
CPU_LCD_D2: RN11.1 U1.148(LCD_D2)
CPU_LCD_D3: RN11.2 U1.147(LCD_D3)
CPU_LCD_D4: RN11.3 U1.146(LCD_D4)
CPU_LCD_D5: RN11.4 U1.145(LCD_D5)
CPU_LCD_D6: RN12.1 U1.144(LCD_D6)
CPU_LCD_D7: RN12.2 U1.143(LCD_D7)
CPU_LCD_D10: RN12.3 U1.141(LCD_D10)
CPU_LCD_D11: RN12.4 U1.140(LCD_D11)
CPU_LCD_D12: RN13.1 U1.139(LCD_D12)
CPU_LCD_D13: RN13.2 U1.138(LCD_D13)
CPU_LCD_D14: RN13.3 U1.137(LCD_D14)
CPU_LCD_D15: RN13.4 U1.136(LCD_D15)
CPU_LCD_D18: RN14.1 U1.135(LCD_D18)
CPU_LCD_D19: RN14.2 U1.134(LCD_D19)
CPU_LCD_D20: RN14.3 U1.133(LCD_D20)
CPU_LCD_D21: RN14.4 U1.132(LCD_D21)
CPU_LCD_D22: RN15.1 U1.131(LCD_D22)
CPU_LCD_D23: RN15.2 U1.130(LCD_D23)
CPU_LCD_DE: RN15.4 U1.128(LCD_DE)
CPU_LCD_HSYNC: R36.1 U1.127(LCD_HSYNC)
CPU_LCD_VSYNC: R37.1 U1.126(LCD_VSYNC)
CSI_D0: J1.20 RN17.5
CSI_D1: J1.19 RN17.6
CSI_D2: J1.22 RN17.7
CSI_D3: J1.21 RN17.8
CSI_D4: J1.24 RN16.5
CSI_D5: J1.23 RN16.6
CSI_D6: J1.26 RN16.7
CSI_D7: J1.25 RN16.8
CSI_HSYNC: J1.18 RN18.7
CSI_MCLK: J1.15 RN18.6
CSI_PCLK: J1.16 RN18.5
CSI_PWR_EN: J1.4 R41.2 U4.5(GPIO2)
CSI_RST: J1.3 U4.3(GPIO3)
CSI_VSYNC: J1.17 RN18.8
D0: RN1.8 U2.B3(DQ0)
D1: RN2.5 U2.C7(DQ1)
D2: RN1.7 U2.C2(DQ2)
D3: RN2.6 U2.C8(DQ3)
D4: RN1.5 U2.E3(DQ4)
D5: RN2.8 U2.E8(DQ5)
D6: RN1.6 U2.D2(DQ6)
D7: RN2.7 U2.E7(DQ7)
D8: RN3.6 U3.C8(DQ3)
D9: RN4.6 U3.D2(DQ6)
D10: RN3.8 U3.E8(DQ5)
D11: RN4.5 U3.E3(DQ4)
D12: RN3.5 U3.C7(DQ1)
D13: RN4.7 U3.C2(DQ2)
D14: RN3.7 U3.E7(DQ7)
D15: RN4.8 U3.B3(DQ0)
DDR3_A0: RN5.1 U1.64(DDR3_A0)
DDR3_A1: RN6.3 U1.52(DDR3_A1)
DDR3_A2: RN8.3 U1.66(DDR3_A2)
DDR3_A3: RN8.4 U1.65(DDR3_A3)
DDR3_A4: RN6.4 U1.51(DDR3_A4)
DDR3_A5: RN8.2 U1.67(DDR3_A5)
DDR3_A6: RN6.2 U1.54(DDR3_A6)
DDR3_A7: RN10.2 U1.71(DDR3_A7)
DDR3_A8: RN6.1 U1.55(DDR3_A8)
DDR3_A9: RN10.4 U1.69(DDR3_A9)
DDR3_A10: RN7.3 U1.48(DDR3_A10)
DDR3_A11: RN9.4 U1.56(DDR3_A11)
DDR3_A12: RN7.1 U1.50(DDR3_A12)
DDR3_A13: RN8.1 U1.68(DDR3_A13)
DDR3_A14: RN9.3 U1.57(DDR3_A14)
DDR3_BA0: RN5.2 U1.63(DDR3_BA0)
DDR3_BA1: RN7.2 U1.49(DDR3_BA1)
DDR3_BA2: RN5.3 U1.61(DDR3_BA2)
DDR3_CAS: RN9.1 U1.59(DDR3_CAS)
DDR3_CKE: RN7.4 U1.47(DDR3_CKE)
DDR3_CLK: R4.1 U1.45(DDR3_CLK)
DDR3_CLK_N: R3.1 U1.46(DDR3_CLK_N)
DDR3_D0: RN1.1 U1.22(DDR3_D0)
DDR3_D1: RN2.4 U1.40(DDR3_D1)
DDR3_D2: RN1.2 U1.21(DDR3_D2)
DDR3_D3: RN2.3 U1.41(DDR3_D3)
DDR3_D4: RN1.4 U1.19(DDR3_D4)
DDR3_D5: RN2.1 U1.44(DDR3_D5)
DDR3_D6: RN1.3 U1.20(DDR3_D6)
DDR3_D7: RN2.2 U1.42(DDR3_D7)
DDR3_D8: RN3.3 U1.37(DDR3_D8)
DDR3_D9: RN4.3 U1.25(DDR3_D9)
DDR3_D10: RN3.1 U1.39(DDR3_D10)
DDR3_D11: RN4.4 U1.24(DDR3_D11)
DDR3_D12: RN3.4 U1.36(DDR3_D12)
DDR3_D13: RN4.2 U1.26(DDR3_D13)
DDR3_D14: RN3.2 U1.38(DDR3_D14)
DDR3_D15: RN4.1 U1.27(DDR3_D15)
DDR3_DM0: R10.1 U1.29(DDR3_DM0)
DDR3_DM1: R11.1 U1.28(DDR3_DM1)
DDR3_DQS0: R6.1 U1.31(DDR3_DQS0)
DDR3_DQS0_N: R5.1 U1.32(DDR3_DQS0_N)
DDR3_DQS1: R8.1 U1.33(DDR3_DQS1)
DDR3_DQS1_N: R7.1 U1.34(DDR2_DQS1_N)
DDR3_ODT: RN10.1 U1.72(DDR3_ODT)
DDR3_RAS: RN9.2 U1.58(DDR3_RAS)
DDR3_RST: RN10.3 U1.70(DDR3_RST)
DDR3_WE: RN5.4 U1.60(DDR3_WE)
DDR_VREF: C1.1 C2.1 C35.2 C36.1 R12.2 R13.1 U2.E1(VREFDQ) U2.J8(VREFCA) U3.E1(VREFDQ) U3.J8(VREFCA)
DM0: R10.2 U2.B7(DM/T\D\Q\S\)
DM1: R11.2 U3.B7(DM/T\D\Q\S\)
DQS0: R6.2 U2.C3(DQS)
DQS0_N: R5.2 U2.D3(D\Q\S\)
DQS1: R8.2 U3.C3(DQS)
DQS1_N: R7.2 U3.D3(D\Q\S\)
DZQ: R9.1 U1.17(DZQ)
EXTEN: J2.16 U4.20(EXTEN) U6.1(EN) U7.4(EN)
HPCOM: J2.39 U1.77(HPCOM)
HPOUTL: J2.40 U1.74(HPOUTL)
HPOUTR: J2.38 U1.78(HPOUTR)
IPSOUT: C67.1 C68.1 C73.1 C74.1 C78.1 C83.1 C88.1 C92.1 C94.1 J2.9 J2.11 L6.1 LED1.2(ANODE) U4.7(VIN2) U4.13(LDO24IN) U4.14(VIN3) U4.21(APS) U4.34(IPSOUT1) U4.35(IPSOUT2) U4.40(LDO3IN) U4.44(VIN1) U5.4(IN) U6.4(IN) U7.5(IN)
LCD_BL_EN: J1.28 U4.18(GPIO1)
LCD_CLK: J1.32 RN15.6
LCD_D2: J1.50 RN11.8
LCD_D3: J1.49 RN11.7
LCD_D4: J1.48 RN11.6
LCD_D5: J1.47 RN11.5
LCD_D6: J1.46 RN12.8
LCD_D7: J1.45 RN12.7
LCD_D10: J1.44 RN12.6
LCD_D11: J1.43 RN12.5
LCD_D12: J1.42 RN13.8
LCD_D13: J1.41 RN13.7
LCD_D14: J1.40 RN13.6
LCD_D15: J1.39 RN13.5
LCD_D18: J1.38 RN14.8
LCD_D19: J1.37 RN14.7
LCD_D20: J1.36 RN14.6
LCD_D21: J1.35 RN14.5
LCD_D22: J1.34 RN15.8
LCD_D23: J1.33 RN15.7
LCD_DE: J1.31 RN15.5
LCD_HSYNC: J1.30 R36.2
LCD_PWR: J1.27 U4.19(GPIO0)
LCD_VSYNC: J1.29 R37.2
LRADC: C106.1 J2.35 U1.86(LRADC)
MICIN1: J2.37 U1.84(MICIN1)
N_VBUSEN: J2.18 U4.6(N_VBUSEN)
NALE/SPI0_MISO: J2.43 U1.7(NALE/SPI0_MISO)
NCE0: J1.77 U1.2(NCE0)
NCE1/SPI0_CS0: J2.41 U1.3(NCE1/SPI0_CS0)
NCLE/SPI0_CLK: J2.42 U1.6(NCLE/SPI0_CLK)
NDQ0/SDC2_D0: J1.70 U1.174(NDQ0/SDC2_D0)
NDQ1/SDC2_D1: J1.69 U1.172(NDQ1/SDC2_D1)
NDQ2/SDC2_D2: J1.68 U1.171(NDQ2/SDC2_D2)
NDQ3/SDC2_D3: J1.67 U1.170(NDQ3/SDC2_D3)
NDQ4/SDC2_D4: J1.66 U1.168(NDQ4/SDC2_D4)
NDQ5/SDC2_D5: J1.65 U1.167(NDQ5/SDC2_D5)
NDQ6/SDC2_D6: J1.64 U1.166(NDQ6/SDC2_D6)
NDQ7/SDC2_D7: J1.63 U1.165(NDQ7/SDC2_D7)
NDQS: J1.62 U1.162(NDQS)
NMI_N: R35.2 U1.158(NMI_N) U4.48(IRQ) U8.3(I\N\T\)
NRB0/SDC2_CMD: J1.72 U1.176(NRB0/SDC2_CMD)
NRB1/SDC2_CLK: J1.71 U1.175(NRB1/SDC2_CLK)
NRE: J1.78 U1.1(NRE)
NWE/SPI0_MOSI: J2.44 U1.8(NWE/SPI0_MOSI)
ODT: RN10.8 U2.G1(ODT) U3.G1(ODT)
PB2/PWM: J1.75 U1.103(PB2/PWM/SPI2_MOSI/EINT16)
PB3/IR_TX: J1.73 U1.150(PB3/IR_TX/SPI2_MISO/EINT17)
PB4/IR_RX: J1.74 U1.104(PB4/IR_RX/EINT18)
PB10: J1.76 U1.10(PB10/SPI2_CS1/EINT24)
PG0: J1.57 U1.155(PG0/EINT0)
PG1: J1.56 U1.154(PG1/EINT1)
PG2: J1.55 U1.153(PG2/EINT2)
PG3/UART1_TX: J1.54 U1.152(PG3/UART1_TX/EINT3)
PG4/UART1_RX: J1.53 U1.151(PG4/UART1_RX/EINT4)
PG9/SPI1_CS0: J1.58 U1.12(PG9/SPI1_CS0/UART3_TX/EINT9)
PG10/SPI1_CLK: J1.59 U1.13(PG10/SPI1_CLK/UART3_RX/EINT10)
PG11/SPI1_MOSI: J1.60 U1.14(PG11/SPI1_MOSI/UART3_CTS/EINT11)
PG12/SPI1_MISO: J1.61 U1.15(PG12/SPI1_MISO/UART3_RTS/EINT12)
PMIC_VBUS: J2.13 R19.1 U4.31(VBUS)
PWRON: C84.1 J2.17 U4.47(PWRON)
RASN: RN9.7 U2.F3(R\A\S\) U3.F3(R\A\S\)
RESET_N: C108.1 C109.1 J2.14 R40.2 U1.159(RESET_N) U4.25(PWROK)
RST_BT: J2.20 R22.1 U4.4(N_OE)
RSTN: RN10.6 U2.N2(R\E\S\E\T\) U3.N2(R\E\S\E\T\)
SDC0_CLK: J1.10 RN19.7
SDC0_CMD: J1.9 RN19.8
SDC0_D0: J1.7 RN19.6
SDC0_D1: J1.8 RN19.5
SDC0_D2: J1.11 R38.2
SDC0_D3: J1.12 R39.2
SVREF: C3.1 C39.1 C40.2 R14.2 R15.1 U1.18(SVREF)
TPX1: J2.32 U1.89(TPX1)
TPX2: J2.34 U1.87(TPX2)
TPY1: J2.31 U1.90(TPY1)
TPY2: J2.33 U1.88(TPY2)
TWI0_SCL: J2.24 R23.1 U1.101(TWI0_SCL) U4.2(SCL)
TWI0_SDA: J2.22 R24.1 U1.102(TWI0_SDA) U4.1(SDA)
TWI1_SCL: J1.6 R31.1 U1.105(PB15/TWI1_SCL) U8.6(SCL)
TWI1_SDA: J1.5 R32.1 U1.106(PB16/TWI1_SDA) U8.5(SDA)
TWI2_SCL: J1.14 R33.1 U1.161(PB17/TWI2_SCL)
TWI2_SDA: J1.13 R34.1 U1.160(PB18/TWI2_SDA)
UBOOT: J2.19 U1.157(UBOOT)
UDM0: J2.29 U1.93(UDM0)
UDM1: J2.25 U1.95(UDM1)
UDP0: J2.27 U1.94(UDP0)
UDP1: J2.23 U1.96(UDP1)
VMIC: J2.36 U1.85(VMIC)
VUSB_5V: C93.1 D1.C J2.21 R29.1
WEN: RN5.5 U2.H3(W\E\) U3.H3(W\E\)
WIFI_3V3: C75.1 J2.15 U4.41(LDO3)
N13399856: R1.1 U2.H8(ZQ)
N13404276: R2.1 U3.H8(ZQ)
N13497800: C57.1 U1.91(X24MOUT) Y1.1
N13497804: C58.1 U1.92(X24MIN) Y1.3
N13506317: L1.1 U4.45(LX1)
N13506349: L2.1 U4.8(LX2)
N13506381: L3.1 U4.15(LX3)
N13506393: C64.1 C65.1 L1.2 R16.1 U4.43(CHSENSE)
N13519262: R17.1 U4.37(TS)
N13520877: C79.1 R18.2
N13522155: C80.1 R19.2
N13524720: R20.1 U4.36(CHGLED)
N13524724: LED1.1(CATHODE) R20.2
N13525653: R21.1 U4.23(BIAS)
N13530150: C82.1 U4.24(VREF)
N13539950: C87.2 R25.2 R26.1 U5.5(FB)
N13544412: C91.2 R27.2 R28.1 U6.5(FB)
N13547741: D1.A L6.2 U7.1(LX)
N13547851: R29.2 R30.1 U7.3(FB)
N14964839: C95.1 U8.1(OSCI) Y2.1
N14964843: U8.2(OSCO) Y2.2
N14967756: D2.C R35.1
N14975640: R39.1 U1.112(SDC0_D3)
N14975652: R38.1 U1.113(SDC0_D2)
N14977186: RN19.4 U1.107(SDC0_D1)
N14977190: RN19.3 U1.108(SDC0_D0)
N14977194: RN19.2 U1.110(SDC0_CLK)
N14977198: RN19.1 U1.111(SDC0_CMD)
N14981531: C98.1 C99.1 U1.80(VRP)
N14985018: C100.1 U1.82(VRA2)
N14986399: C101.1 C102.1 U1.83(VRA1)
N14991476: C104.1 C105.1 U1.75(HPBP)
N15049270: LED2.1(CATHODE) R42.1
N135382722: L4.1 U5.3(LX)
N135443040: L5.1 U6.3(LX)

Pads without a net: J2 51 52 53 54 55 56 57 58 59 60 61 62 63 64 65 66 67 68 69 70 71 72 73 74 75 76 77 78 79 80; U1 99; U2 A3 A7 F1 F9 H1 H9 J7; U3 A3 A7 F1 F9 H1 H9 J7; U4 11 29 30; U7 6; U8 7

## Via types
v1: diameter 0.457, hole 0.203, TOP to BOTTOM, 531 vias
v2: diameter 3, hole 1.5, TOP to BOTTOM, 2 vias

## Routing (per net, layer and track width the routed paths; a pad name or vN(x,y) marks a point on that pad's centre or on a via; arc(x,y) is an arc through that point)
AVCC_3V: length 52.9
  TOP w0.2: U1.81 36.2,33.7 ; 32.21,34.39 31.3,35.3 31.3,40.3 32,41 32,44.2 32.9,45.1 32.9,45.7 33.3,46.1 34.4,46.1 35.15,45.35 U5.1
  TOP w0.375: 36.2,33.7 v1(36.2,33.6) 36.2,33.27 35.83,32.9 33.7,32.9 32.21,34.39 C107.1
  TOP w0.4: v1(15,36.4) v1(15,35.8) 14.5,35.3 14.5,33 14.04,32.54 C77.1
  BOTTOM w0.4: v1(36.2,33.6) 35.3,32.7 31.9,32.7 30.9,31.7 27.8,31.7 23.9,35.6 15.2,35.6 v1(15,35.8) v1(15,36.4)
  vias: v1(12.7,30.4) v1(13.3,31) v1(13.4,31.8)
GND: length 113.7
  TOP w0.18: v1(68.8,32.7) 68.8,33.4
  TOP w0.2: 68.8,33.4 68.4,33.8 U3.F8 ; U4.22 7.9,30.1 ; U4.9 11.6,28.8 ; U4.46 10.7,25.5 ; U1.79 v1(37,33.6) ; 10.3,30.1 U4.16
  TOP w0.375: C19.2 v1(71.6,9.6) ; C13.2 v1(79.9,36.5) ; C29.2 71.8,24.8 v1(72.4,24.2) 72.6,24 C24.2 ; U2.N9 v1(74,20.5) ; R2.2 v1(69.6,38.2) ; C5.2 55.96,26.76 v1(56.1,26.9) ; C71.2 v1(3.84,37.1) C72.2 ; C97.2 v1(27.4,27.3) ; R22.2 v1(19.4,25.3) ; v1(48.9,38.2) 48.86,38.16 48.86,38.15 C7.2 ; C12.2 v1(70.5,46) ; C14.2 v1(79.7,15) ; C43.2 v1(55.1,12.7) ; C68.2 v1(17.1,25.3) ; U2.F2 v1(68,14.8) ; Y1.4 v1(25.6,35.1) 25,35.7 C57.2 ; v1(70.8,21.6) 70.6,21.8 C36.2 R13.2 ; U3.B8 v1(64.8,33.6) ; C62.2 v1(44.9,9.9) ; C22.2 v1(66.6,23.9) ; C106.2 v1(32.6,38.6) ; U3.D8 v1(66.4,33.6) ; C20.2 v1(73.2,9.6) ; C21.2 v1(65.95,22.25) ; C52.2 v1(27.4,29.3) ; U8.4 6.29,7.89 v1(6.9,8.5) ; C101.2 v1(32.04,40.16) ; C96.2 v1(8.7,13.3) ; C34.2 v1(61.3,35.3) ; U3.C9 v1(66,35.3) ; U2.A1 v1(64.4,13.1) 63.09,13.1 C16.2 ; C58.2 23.8,28.1 v1(23.2,28.7) Y1.2 ; C74.2 v1(8.3,20.3) ; C38.2 v1(65.95,26.15) ; C89.2 v1(19.8,13.8) ; v1(69.6,23.9) R1.2 C33.2 C23.2 v1(67.6,23.9) ; C41.2 v1(54.4,19.2) ; U2.D8 v1(66.4,18.8) ; U2.J1 v1(70.8,13.1) ; U3.D9 v1(66.8,35.3) ; C25.2 73.6,23.8 v1(73.2,24.2) 72.8,24.6 C30.2 ; C82.2 v1(5.6,33.9) ; v1(31.4,45.3) 31.84,45.74 C88.2 ; C73.2 v1(11.8,34.7) ; C67.2 v1(13.1,20.3) ; 77,11.5 76.6,11.1 v1(76.6,10.5) ; 77,11.5 C15.2 ; 77,11.5 77.5,11 v1(77.5,10.5) ; C108.2 v1(2.8,32.7) ; C75.2 v1(11.5,20.3) ; 10.3,30.1 10.3,28.8 v2(9.3,27.8) ; U2.L9 v1(72.4,20.5) ; C47.2 v1(45.9,9.9) ; C78.2 v1(3,23.2) ; C45.2 v1(42.6,9.9) ; C79.2 v1(1.4,23.2) ; v1(67.6,24.5) C28.2 C2.2 ; U2.D1 v1(66.8,13.1) ; C50.2 v1(73,38.2) ; v1(55.5,15.2) 55.1,15.6 C42.2 ; U3.N1 v1(73.6,28) ; C37.2 v1(64.7,9.6) ; C49.2 v1(71.4,38.2) ; C93.2 v1(25.8,40.7) ; C109.2 v1(43.6,9.9) ; U2.F8 v1(68,18.8) ; C98.2 v1(37.4,39.5) ; C84.2 v1(14.7,20.3) ; C61.2 v1(37,9.9) ; C48.2 v1(49.4,9.9) ; C77.2 v1(13.4,34.7) ; v2(9.3,27.8) 7.9,29.2 7.9,30.1 ; v2(9.3,27.8) 10.7,26.4 10.7,25.5 ; C18.2 v1(67.2,9.6) ; C32.2 v1(62.4,38.1) ; C99.2 v1(36,38.6) ; C9.2 v1(55.91,29.6) ; C95.2 v1(1.1,13.3) ; U2.B8 v1(64.8,18.8) ; C103.2 v1(37,38.6) ; C59.2 v1(30.9,41.2) ; C56.2 v1(25.8,36.8) ; C64.2 v1(5.56,15.44) ; v1(59.7,10.19) C39.2 R15.2 ; C31.2 v1(65.2,38.1) ; R17.2 v1(4.49,23.31) ; C26.2 63.11,27.9 v1(64.4,27.9) U3.A1 ; C66.2 v1(6.7,20.3) ; U3.A8 v1(64,33.6) ; C10.2 v1(59.11,24.71) ; C46.2 v1(47.8,9.9) ; C1.2 v1(68.4,9.6) ; C90.2 v1(17.1,10.2) ; R28.2 v1(18.61,11.01) ; C105.2 v1(38.2,38.6) ; R9.2 v1(57.3,12.6) ; U3.F2 v1(68,29.6) ; C107.2 v1(30.8,35.9) ; C6.2 v1(55.91,32.9) ; v1(64.34,24.96) C111.2 v1(65.66,24.96) ; C4.2 v1(55.91,23.5) ; C81.2 v1(4.6,32) ; U2.B1 v1(65.2,13.1) ; C76.2 v1(3.3,32) ; U3.L1 v1(72.8,28.8) ; C63.2 v1(52.9,12.7) ; C60.2 v1(27.4,28.3) ; C8.2 v1(45.2,38.8) ; U3.J9 v1(70.8,35.3) ; U3.J1 v1(71.2,28.8) ; U2.A8 v1(64,18.8) ; C86.2 v1(32.56,43.66) ; C110.2 v1(61.2,38) ; C83.2 v1(7.9,34.7) ; C44.2 v1(54,12.7) ; C100.2 v1(34.8,38.6) ; U2.J9 v1(70.8,20.5) ; U3.D1 v1(66.8,27.9) ; C17.2 v1(66,9.6) ; C3.2 v1(58.1,16.1) ; U3.H2 v1(69.6,29.6) ; C70.2 v1(15.8,36.4) ; U3.L9 v1(72.4,35.3) ; U2.L1 v1(72.4,13.1) ; C104.2 v1(40.6,39.5) ; C11.2 v1(56.5,33.6) ; C55.2 v1(27.43,21.67) ; U3.B1 v1(65.2,27.9) ; U2.C9 v1(66,20.5) ; C102.2 v1(33.8,38.6) ; C51.2 v1(39.2,38.6) ; U3.B2 v1(64.8,28.8) ; U2.B2 v1(64.8,14) ; C53.2 v1(27.9,24.6) ; U2.N1 v1(74,13.1) ; U3.N9 v1(74,35.3) ; R26.2 v1(34.6,42.3) ; U2.H2 v1(69.6,14.8) ; C80.2 v1(1.4,30.2) ; R21.2 v1(6.6,33.9) ; C54.2 v1(39.8,9.9) ; C85.2 v1(37,41.5) ; C27.2 v1(66.6,24.5) ; U2.D9 v1(66.8,20.5) ; C94.2 v1(14.3,46.06) ; C69.2 v1(17.4,36.4)
  TOP w0.4: 11.6,28.8 10.3,28.8
  vias: v1(7.5,27.8) v1(7.6,29.5) v1(7.6,26.1) v1(9.3,29.6) v1(9.3,26) v1(11,29.5) v1(11,26.1) v1(11.1,27.8) v1(11.7,13.6) v1(11.7,13) v1(11.7,12.4) v1(12.4,13.6) v1(12.4,13) v1(13.1,13.6) v1(13.1,13) v1(13.3,12.2) v1(15.1,12.1) v1(20.1,45.2) v1(20.7,44.6) v1(21.1,44.2) v1(35,47.3) v1(35,46.6) v1(37.2,45.9) v1(37.6,45.3) v1(37.6,44.6) v1(39.3,26.7) v1(39.3,24) v1(39.3,21.3) v1(40,26) v1(40,22) v1(40.2,24) v1(40.7,25.3) v1(40.7,22.7) v1(42,26.7) v1(42,25.8) v1(42,22.2) v1(42,21.3) v1(43.3,25.3) v1(43.3,22.7) v1(43.8,24) v1(44,26) v1(44,22) v1(44.7,26.7) v1(44.7,24) v1(44.7,21.3) v2(42,24)
VCC_3V3: length 37.3
  TOP w0.2: U1.5 v1(51.6,17) ; 30.1,28.2 U1.100 ; v1(45.4,14.39) U1.163 45.4,12.3 44.9,11.8 C62.1 ; U1.142 v1(37,12) ; 38.2,35.9 U1.76 ; U1.97 v1(29.8,29.4)
  TOP w0.3: v1(29.8,28.2) 30.1,28.2
  TOP w0.35: v1(37,12) C61.1
  TOP w0.375: v1(29.2,5.5) R34.2 R33.2 ; R32.2 v1(9.7,6.4) ; C103.1 v1(37,36.4) 37.2,36.2 37.9,36.2 38.2,35.9 ; v1(25.6,26.3) R23.2 R24.2 ; R40.1 v1(2.8,33.8) ; R41.1 v1(2.4,6.4) ; v1(29.8,28.2) 29.11,28.2 C60.1 C97.1 ; R31.2 v1(5.1,6.4) ; C63.1 v1(52.9,14.8) ; C59.1 v1(30.9,44.4)
  BOTTOM w0.375: v1(0.8,18.3) 0.8,28.5 2.1,29.8 2.1,33.1 v1(2.8,33.8)
  vias: v1(16.3,20.4) v1(16.9,20.4) v1(17.2,19.8) v1(17.5,20.4) v1(17.8,19.8) v1(18.1,20.4) v1(18.4,22.2) v1(18.4,21.6) v1(18.4,21) v1(18.4,19.8) v1(18.7,20.4) v1(19,22.2) v1(19,21.6) v1(19,21) v1(19,19.8) v1(19.3,20.4) v1(19.6,22.2) v1(19.6,21.6) v1(19.6,21) v1(19.6,19.8)
VCC_DRAM: length 72.8
  TOP w0.125: 71.6,20.67 71.6,21.4 ; 71.6,35.47 71.6,36.13 ; 73.2,21.2 73.2,20.67 ; 68.8,19.7 68.8,20.5 ; 73.2,35.47 73.2,36.2
  TOP w0.2: v1(51.6,32.2) U1.43 53.8,32.2 53.9,32.3 54.25,32.3 54.36,32.19 54.88,32.19 C6.1 ; 43.8,35.9 U1.62 43.8,33.8 ; 53.9,24.2 U1.23 51.8,24.2 ; v1(51.61,27) U1.30 53.83,27 53.86,27.03 54.28,27.03 54.6,26.7 54.91,26.4 C5.1 ; 47.4,33.8 U1.53 47.4,35.9
  TOP w0.375: U3.M1 v1(72.8,28) 72.8,27.5 72.8,27.5 C30.1 ; C11.1 v1(54.89,32.91) C6.1 ; 77,13.1 76.6,13.5 v1(76.6,14) ; 77,13.1 77.3,13.4 v1(77.3,14) ; 77,13.1 C15.1 ; 68.8,20.5 68.6,20.7 C33.1 ; U2.A9 v1(64.4,20.5) ; C23.1 v1(67.6,20.5) U2.E9 ; 73.2,36.2 73,36.4 C50.1 ; 73.2,35.47 v1(73.2,35.3) U3.M9 ; C31.1 v1(67.1,38.1) ; C26.1 63.39,29.2 v1(63.8,29.2) U3.A2 ; U2.C1 v1(66,13.1) ; 73.2,20.67 v1(73.2,20.5) U2.M9 ; U2.M1 v1(73.2,13.1) C20.1 ; C29.1 71.8,27.4 v1(71.2,28) U3.K1 ; 73.2,21.33 v1(73.2,21.6) 73.6,22 C25.1 ; U2.A2 v1(63.8,14.4) 62.99,14.4 C16.1 ; 47.4,35.9 47.4,36.68 C7.1 ; U3.E2 v1(68,28.8) ; C24.1 72.6,21.8 v1(72.4,21.6) 71.8,21.6 71.6,21.4 ; v1(64.3,23.44) C111.1 v1(65.7,23.44) ; 51.8,24.2 v1(51.6,24.2) ; C4.1 54.79,24.2 53.9,24.2 ; U3.C1 v1(66,27.9) ; U3.G8 v1(69.6,33.6) ; C17.1 v1(66,11.8) ; v1(63.6,9.6) R14.1 C40.1 ; 68.8,19.7 68.8,19.6 U2.G8 v1(69.6,18.8) ; C19.1 v1(71.6,13.1) U2.K1 ; C28.1 v1(67.6,26.5) ; C38.1 v1(64,26.15) ; C12.1 v1(68.3,46) ; U3.B9 v1(65.2,35.3) ; C37.1 v1(64.7,11.8) ; U3.A9 v1(64.4,35.3) C34.1 ; C110.1 v1(58.4,38) ; U2.D7 v1(66.8,17.9) ; C8.1 43.8,37.4 43.8,35.9 ; U3.K9 v1(71.6,35.3) 71.6,35.47 ; 71.6,20.67 v1(71.6,20.5) U2.K9 ; 47.4,33.8 v1(47.4,33.6) ; C27.1 v1(66.6,26.5) ; C21.1 v1(64.49,22.7) ; C22.1 v1(66.6,21.9) ; U3.D7 v1(66.8,32.7) ; U2.B9 v1(65.2,20.5) ; 43.8,33.8 v1(43.8,33.6) ; C32.1 v1(64.4,38.1) ; C10.1 v1(58.09,24.7) ; C18.1 v1(67.2,11.8) ; v1(71.2,26.9) 70.8,26.5 R12.1 C35.1 ; U3.E9 v1(67.6,35.3) ; U3.G2 v1(69.6,28.8) ; C13.1 v1(79.9,34.5) ; 71.6,36.13 71.4,36.33 C49.1 ; U2.E2 v1(68,14) ; U2.G2 v1(69.6,14) ; C14.1 v1(79.7,17.1)
  vias: v1(38.6,43.8) v1(39.4,44.6) v1(39.4,43.8) v1(40.2,44.6) v1(40.2,43.8) v1(41,44.6) v1(41,43.8) v1(41.8,44.6) v1(41.8,43.8) v1(42.6,44.6) v1(42.6,43.8) v1(43.4,44.6) v1(43.4,43.8) v1(43.4,43)
VDD_CPU: length 24.2
  TOP w0.2: U1.11 53.59,19.4 54.5,18.49 54.5,17.5 v1(54.75,17.25) 55.1,16.9 C42.1 ; U1.4 53.69,16.6 v1(54,16.29) v1(54,14.8) C44.1 ; U1.169 v1(47.8,12) ; U1.173 v1(49.4,12) ; U1.164 v1(45.8,12) ; U1.156 v1(42.6,12) ; C43.1 54.6,14.71 v1(54.6,14.8) 54.5,14.9 54.5,16.6 v1(54,17.1) 54,18.38 53.77,18.6 U1.9 ; v1(51.5,21.6) 51.7,21.4 U1.16 53.9,21.4 54.4,20.9 C41.1
  TOP w0.35: v1(47.8,12) C46.1 ; v1(45.8,12) 45.9,11.9 C47.1 ; v1(42.6,12) C45.1 ; v1(49.4,12) C48.1
  vias: v1(16.6,33.2) v1(17.4,33.2) v1(18.2,34.8) v1(18.2,34) v1(18.2,33.2) v1(19,34.8) v1(19,34) v1(19,33.2) v1(19.8,33.2)
VDD_INT: length 31.6
  TOP w0.2: v1(32.4,29) U1.98 30.2,29 ; U1.109 30.2,24.6 ; 39.4,35.8 U1.73 ; 39.8,14.4 U1.149 v1(39.8,12) ; 53.8,29 U1.35 v1(51.6,29)
  TOP w0.3: 30.2,29 30,28.8 29.6,28.8 29.1,29.3 C52.1
  TOP w0.35: C54.1 v1(39.8,12)
  TOP w0.375: v1(29.7,22.7) 29.44,22.44 C55.1 ; 30.2,24.6 v1(29.9,24.6) C53.1 ; C56.1 v1(25.8,39.7) ; C9.1 53.8,29 ; 39.4,35.8 39.4,36.3 v1(39.2,36.5) C51.1
  TOP w0.5: v1(32.9,25) v1(32.9,24.3) 32.9,17.3 35.4,14.8 39.4,14.8 39.8,14.4
  vias: v1(11,43.8) v1(11,43) v1(11,42.2) v1(11.7,43.8) v1(11.7,43) v1(11.7,42.2) v1(12.4,43.8) v1(12.4,43) v1(12.4,42.2)
VDD_RTC: length 23.7
  BOTTOM w0.375: v1(5.1,29.1) 4.6,29.6 v1(4.5,29.6) 2.4,27.5 2.4,25 3.7,23.7 3.7,22 3.1,21.4 3.1,15.9 3.45,15.55 3.45,15.22 3.75,14.92 4.08,14.92 7.3,11.7 v1(8,11.7) v1(8.7,11.7)
A0: length 64.8
  TOP w0.125: U3.K3 71.6,30.4 72.5,31.3 75.6,31.3 76.9,32.6 v1(76.9,33.3) 76.9,33.5 77.1,33.7 77.1,38.8 72.7,43.2 56.3,43.2 56.1,43 54.2,43 53.8,43.4 51,43.4 50.5,42.9 49.75,42.9 49.74,42.89 ; U2.K3 71.6,15.6 72.5,16.5 75.6,16.5 76.9,17.8 v1(76.9,18.5)
  BOTTOM w0.125: v1(76.9,33.3) 76.9,32.4 77.1,32.2 77.1,19.12 76.9,18.92 v1(76.9,18.5)
A1: length 43.4
  TOP w0.125: RN6.6 56.65,39.55 57.3,40.2 71.7,40.2 73.6,38.3 v1(73.6,35.8) 73.6,34.6 73.4,34.4 73,34.4 72.8,34.2 72.8,33.6 U3.L7 ; U2.L7 72.8,18.8 72.8,19.4 73,19.6 73.4,19.6 73.6,19.8 v1(73.6,21)
  BOTTOM w0.125: v1(73.6,21) 73.6,27.3 73.2,27.7 73.2,31.6 73.1,31.7 73.1,33.8 73.6,34.3 v1(73.6,35.8)
A2: length 59.1
  TOP w0.125: U2.L3 72.4,15.6 72.7,15.9 75.8,15.9 77.7,17.8 v1(77.7,18.5) ; RN8.6 56.64,43.96 56.8,43.8 72.9,43.8 77.7,39 v1(77.7,33.3) 77.7,32.6 75.8,30.7 72.7,30.7 72.4,30.4 U3.L3
  BOTTOM w0.125: v1(77.7,33.3) v1(77.7,18.5)
A3: length 60.1
  TOP w0.125: U3.K2 72,29.6 72,30.4 72.6,31 75.7,31 77.3,32.6 v1(77.3,32.8) 77.3,33.5 77.4,33.6 77.4,38.9 72.84,43.46 RN8.5 ; U2.K2 72,14.8 72,15.6 72.6,16.2 75.7,16.2 77.3,17.8 v1(77.3,18)
  BOTTOM w0.125: v1(77.3,32.8) 77.3,32.4 77.4,32.3 77.4,18.8 77.3,18.7 v1(77.3,18)
A4: length 40
  TOP w0.125: U3.L8 72.4,34.2 72.8,34.6 v1(72.8,35.8) 72.3,36.3 72.3,39.2 71.6,39.9 57.4,39.9 56.55,39.05 RN6.5 ; v1(72.8,21) 72.8,19.8 72.4,19.4 U2.L8
  BOTTOM w0.125: v1(72.8,21) 72.8,27.2 72.4,27.6 72.4,29.1 72.8,29.5 v1(72.8,35.8)
A5: length 60.9
  TOP w0.125: v1(78.1,18) 78.1,17.8 75.9,15.6 73,15.6 72.8,15.4 72.8,14.8 U2.L2 ; U3.L2 72.8,29.6 72.8,30.2 73,30.4 75.9,30.4 78.1,32.6 v1(78.1,32.8) 78.1,33.6 78,33.7 78,39.1 73,44.1 56.9,44.1 56.54,44.46 RN8.7
  BOTTOM w0.125: v1(78.1,32.8) v1(78.1,18)
A6: length 43.8
  TOP w0.125: v1(74,21.5) 74.4,21.1 74.4,19.8 74.2,19.6 73.8,19.6 73.5,19.3 73.3,19.3 U2.M8 ; U3.M8 73.3,34.1 73.5,34.1 73.8,34.4 74.2,34.4 74.4,34.6 74.4,35.9 v1(74,36.3) 74,38.3 71.8,40.5 57.2,40.5 56.75,40.05 RN6.7
  BOTTOM w0.125: v1(74,21.5) 74,31.3 73.4,31.9 73.4,33.6 74.4,34.6 74.4,35.9 v1(74,36.3)
A7: length 70.9
  TOP w0.125: 49.74,45.59 50.41,45.59 50.5,45.5 53.5,45.5 53.9,45.9 56.7,45.9 57.3,45.3 73.4,45.3 79.2,39.5 79.2,34.2 79.7,33.7 v1(79.7,32.8) 79.7,32.6 75.9,28.8 73.6,28.8 U3.M2 ; v1(79.7,18) 79.7,17.8 75.9,14 73.6,14 U2.M2
  BOTTOM w0.125: v1(79.7,32.8) v1(79.7,18)
A8: length 43.7
  TOP w0.125: U2.N8 74.2,19.2 74.7,19.7 74.7,21.28 74.4,21.58 v1(74.4,22) ; RN6.8 56.85,40.55 57.1,40.8 71.9,40.8 74.4,38.3 v1(74.4,36.8) 74.4,36.38 74.7,36.08 74.7,34.5 74.2,34 U3.N8
  BOTTOM w0.125: v1(74.4,36.8) 74.4,36.38 74.7,36.08 74.7,34.5 73.7,33.5 73.7,32.1 74.4,31.4 v1(74.4,22)
A9: length 67.7
  TOP w0.125: U2.M3 73.6,14.8 75.9,14.8 78.9,17.8 v1(78.9,18) ; 49.74,44.59 50.19,44.59 50.5,44.9 53.7,44.9 54.1,45.3 56.5,45.3 57.1,44.7 73.2,44.7 78.6,39.3 78.6,33.9 78.9,33.6 v1(78.9,32.8) 78.9,32.6 75.9,29.6 73.6,29.6 U3.M3
  BOTTOM w0.125: v1(78.9,32.8) v1(78.9,18)
A10: length 46.3
  TOP w0.125: U3.H7 70,33.4 70.4,33.8 v1(70.4,35.8) 70.4,38.7 70.1,39 68.8,39 68.7,38.9 68.7,37.9 68.6,37.8 68.5,37.8 68.4,37.9 68.4,38.9 68.3,39 68.2,39 68.1,38.9 68.1,37.9 68,37.8 67.9,37.8 67.8,37.9 67.8,38.9 67.7,39 57.7,39 56.8,38.1 53.04,38.1 RN7.6 ; U2.H7 70,18.6 70.4,19 v1(70.4,21)
  BOTTOM w0.125: v1(70.4,21) 70.4,22.9 70.8,23.3 70.8,29.1 71.4,29.7 71.4,34 70.4,35 v1(70.4,35.8)
A11: length 50.3
  TOP w0.125: U2.M7 73.6,18.8 74.2,18.8 75,19.6 75,21.5 74.8,21.7 v1(74.8,22.5) ; U3.M7 73.6,33.6 74.2,33.6 75,34.4 75,36.3 74.8,36.5 v1(74.8,37.3) 74.8,38.3 72,41.1 57,41.1 56.8,40.9 53.9,40.9 53.65,40.65 RN9.5
  BOTTOM w0.125: v1(74.8,37.3) 74.8,36.5 75,36.3 75,34.4 74,33.4 74,32.2 74.8,31.4 v1(74.8,22.5)
A12: length 43.4
  TOP w0.125: RN7.8 53.55,39.05 53.9,38.7 56.6,38.7 57.5,39.6 71.5,39.6 72,39.1 v1(72,35.8) 72,33.6 U3.K7 ; v1(72,21) 72,18.8 U2.K7
  BOTTOM w0.125: v1(72,35.8) v1(72,21)
A13: length 58.3
  TOP w0.125: RN8.8 56.44,44.96 57,44.4 73.1,44.4 78.3,39.2 78.3,33.8 78.5,33.6 v1(78.5,33.3) 78.5,32.6 75.9,30 U3.N3 ; v1(78.5,18.5) 78.5,17.8 75.9,15.2 U2.N3
  BOTTOM w0.125: v1(78.5,33.3) v1(78.5,18.5)
A14: length 49.3
  TOP w0.125: U3.N7 74.2,33.2 75.3,34.3 75.3,36.5 75.2,36.6 v1(75.2,36.8) 75.2,38.3 72.1,41.4 56.9,41.4 56.7,41.2 53.04,41.2 RN9.6 ; v1(75.2,22) 75.2,21.7 75.3,21.6 75.3,19.5 74.2,18.4 U2.N7
  BOTTOM w0.125: v1(75.2,36.8) 75.2,36.5 75.3,36.4 75.3,34.3 74.3,33.3 74.3,32.3 75.2,31.4 v1(75.2,22)
ACIN_5V: length 4.3
  TOP w0.375: J2.1 2,48.5 2.8,47.7 LED2.2
  vias: v1(3.1,27) v1(3.1,26.4) v1(3.7,27) v1(3.7,26.4) v1(4.3,27) v1(4.3,26.4) v1(4.9,27) v1(4.9,26.4) v1(5.5,27)
BA0: length 66
  TOP w0.125: v1(76.5,18) 76.5,17.8 75.5,16.8 72.4,16.8 71.2,15.6 71.2,14.8 U2.J2 ; 49.74,42.39 50.39,42.39 51.1,43.1 53.7,43.1 54.1,42.7 56.2,42.7 56.4,42.9 72.6,42.9 76.8,38.7 76.8,33.8 76.5,33.5 v1(76.5,32.8) 76.5,32.6 75.5,31.6 72.4,31.6 71.2,30.4 71.2,29.6 U3.J2
  BOTTOM w0.125: v1(76.5,18) 76.5,18.9 76.8,19.2 76.8,32.08 76.5,32.38 v1(76.5,32.8)
BA1: length 40.8
  TOP w0.125: RN7.7 53.65,38.55 53.8,38.4 56.7,38.4 57.6,39.3 70.4,39.3 70.8,38.9 70.8,36.2 v1(71.2,35.8) 71.2,34.4 U3.K8 ; v1(71.2,21) 71.2,19.6 U2.K8
  BOTTOM w0.125: v1(71.2,21) 71.2,22.8 71.7,23.3 71.7,34.5 71.2,35 v1(71.2,35.8)
BA2: length 64.3
  TOP w0.125: U2.J3 70.8,15.6 72.3,17.1 75.4,17.1 76.1,17.8 v1(76.1,18.5) ; U3.J3 70.8,30.4 72.3,31.9 75.4,31.9 76.1,32.6 v1(76.1,33.3) 76.1,33.5 76.5,33.9 76.5,38.6 72.5,42.6 56.5,42.6 56.3,42.4 54,42.4 53.6,42.8 51.2,42.8 50.3,41.9 49.75,41.9 49.74,41.89
  BOTTOM w0.125: v1(76.1,33.3) 76.1,32.4 76.5,32 76.5,19.4 76.1,19 v1(76.1,18.5)
BAT: length 2.4
  TOP w0.125: U4.39 7.9,25.3 8.1,25.5 8.9,25.5 9.1,25.3 U4.42
  vias: v1(3.9,20.4) v1(3.9,19.8) v1(4.5,20.4) v1(4.5,19.8) v1(5.1,20.4) v1(5.1,19.8) v1(5.7,20.4) v1(5.7,19.8)
CASN: length 60.7
  TOP w0.125: U3.G3 71.7,32.5 74.9,32.5 75.3,32.9 v1(75.3,33.3) 75.3,33.5 75.9,34.1 75.9,38.4 72.3,42 56.7,42 56.5,41.8 53.8,41.8 53.45,42.15 RN9.8 ; U2.G3 71.7,17.7 74.9,17.7 75.3,18.1 v1(75.3,18.5)
  BOTTOM w0.125: v1(75.3,33.3) 75.3,32.3 75.9,31.7 75.9,19.7 75.3,19.1 v1(75.3,18.5)
CKE: length 40.1
  TOP w0.125: U3.G9 v1(69.2,35.8) 69.2,36.2 69.1,36.3 68.5,36.3 68.4,36.4 68.4,36.5 68.5,36.6 69,36.6 69.1,36.7 69.1,36.8 69,36.9 68,36.9 67.9,37 67.9,37.1 68,37.2 69,37.2 69.1,37.3 69.1,37.4 69,37.5 67.6,37.5 67.5,37.6 67.5,38.6 67.4,38.7 57.8,38.7 56.9,37.8 53.8,37.8 53.55,37.55 RN7.5 ; U2.G9 v1(69.2,21)
  BOTTOM w0.125: v1(69.2,21) 68.9,21.3 68.9,28 69.2,28.3 69.2,30.4 69.6,30.8 69.6,32.8 69.2,33.2 v1(69.2,35.8)
CLK: length 37.9
  TOP w0.101: R4.2 56.37,34.5 56.47,34.6 56.47,34.74 56.58,34.84 56.99,34.84 57.43,35.27 57.43,35.91 57.1,36.24 56.72,36.24 56.51,36.45 56.51,36.8 56.71,37 66.8,37 68.3,35.5 68.3,35.2 68.02,34.92 68.02,34.64 68.19,34.47 68.19,34.32 68.02,34.15 68.02,33.81 67.92,33.71 67.92,33.57 68.03,33.47 68.22,33.47 68.4,33.28 U3.F7 68.4,32.2 ; U2.F7 68.4,17.4
  TOP w0.125: 68.4,32.2 v1(68.5,32.1) ; 68.4,17.4 v1(68.5,17.3)
  BOTTOM w0.101: v1(68.5,17.3) 68.7,17.5 68.7,20.25 68.04,20.91 68.04,28.18 68.42,28.56 68.42,29.82 67.85,30.39 67.85,30.82 68.23,31.2 68.55,31.2 68.69,31.34 68.69,31.54 68.5,31.73 v1(68.5,32.1)
CLKN: length 37.9
  TOP w0.101: R3.2 56.37,35.4 56.47,35.3 56.47,35.16 56.58,35.06 56.9,35.06 57.2,35.36 57.2,35.82 57.01,36.01 56.63,36.01 56.28,36.36 56.28,36.89 56.62,37.23 66.89,37.23 68.53,35.59 68.53,35.2 68.76,34.97 68.76,33.84 69.2,33.4 U3.G7 69.2,32.2 ; U2.G7 69.2,17.4
  TOP w0.125: 69.2,32.2 v1(69.1,32.1) ; 69.2,17.4 v1(69.1,17.3)
  BOTTOM w0.101: v1(69.1,32.1) 69.1,31.73 68.91,31.54 68.91,31.24 68.64,30.97 68.32,30.97 68.08,30.73 68.08,30.48 68.65,29.91 68.65,28.47 68.27,28.09 68.27,21 68.93,20.34 68.93,17.47 v1(69.1,17.3)
CPU_CSI_D0: length 8
  TOP w0.125: U1.118 30.3,21 25.51,16.21 RN17.4
CPU_CSI_D1: length 7.4
  TOP w0.125: RN17.3 26.01,16.31 30.3,20.6 U1.119
CPU_CSI_D2: length 6.8
  TOP w0.125: U1.120 30.3,20.2 26.51,16.41 RN17.2
CPU_CSI_D3: length 6.2
  TOP w0.125: RN17.1 27.01,16.51 30.3,19.8 U1.121
CPU_CSI_D4: length 8.8
  TOP w0.125: RN16.4 26.95,13.65 27.4,14.1 27.4,16.5 30.3,19.4 U1.122
CPU_CSI_D5: length 8.2
  TOP w0.125: U1.123 30.3,19 27.7,16.4 27.7,13.8 27.45,13.55 RN16.3
CPU_CSI_D6: length 7.6
  TOP w0.125: RN16.2 28,12.94 28,16.3 30.3,18.6 U1.124
CPU_CSI_D7: length 7.1
  TOP w0.125: U1.125 30.3,18.2 28.3,16.2 28.3,13.7 28.45,13.55 RN16.1
CPU_CSI_HSYNC: length 12.1
  TOP w0.125: RN18.2 24.81,16.31 30.3,21.8 U1.116
CPU_CSI_MCLK: length 12.7
  TOP w0.125: RN18.3 24.31,13.5 24.5,13.69 24.5,16.4 30.3,22.2 U1.115
CPU_CSI_PCLK: length 13.3
  TOP w0.125: U1.114 30.3,22.6 24.2,16.5 24.2,13.8 23.81,13.41 RN18.4
CPU_CSI_VSYNC: length 11.7
  TOP w0.125: U1.117 30.3,21.4 25.1,16.2 25.1,14 25.31,13.79 RN18.1
CPU_LCD_CLK: length 6.7
  TOP w0.125: RN15.3 30.12,13.78 29.5,14.4 29.5,15.7 30.4,16.6 U1.129
CPU_LCD_D2: length 7.4
  TOP w0.125: RN11.1 42.06,7.7 41.2,7.7 39.4,9.5 39.4,9.8 39.2,10 39.2,12 39.4,12.2 U1.148
CPU_LCD_D3: length 7.9
  TOP w0.125: U1.147 39,12.3 38.9,12.2 38.9,9.9 39.1,9.7 39.1,9.4 41.1,7.4 41.3,7.4 41.55,7.15 RN11.2
CPU_LCD_D4: length 8.5
  TOP w0.125: RN11.3 41.55,6.65 41.1,7.1 40.9,7.1 38.8,9.2 38.8,9.5 38.6,9.7 U1.146
CPU_LCD_D5: length 9.1
  TOP w0.125: RN11.4 41.65,6.15 41,6.8 40.8,6.8 38.5,9.1 38.5,9.3 38.2,9.6 U1.145
CPU_LCD_D6: length 4.4
  TOP w0.125: RN12.1 37.95,9.35 37.8,9.5 U1.144
CPU_LCD_D7: length 4.4
  TOP w0.125: RN12.2 37.5,8.94 37.5,12.2 37.4,12.3 U1.143
CPU_LCD_D10: length 4.6
  TOP w0.125: RN12.3 36.95,9.35 36.5,9.8 36.5,12.2 36.6,12.3 U1.141
CPU_LCD_D11: length 4.4
  TOP w0.125: U1.140 36.2,9.7 36.45,9.45 RN12.4
CPU_LCD_D12: length 1.9
  TOP w0.125: U1.139 35.8,11.44 RN13.1
CPU_LCD_D13: length 1.9
  TOP w0.125: U1.138 35.4,12 35.25,11.85 RN13.2
CPU_LCD_D14: length 1.9
  TOP w0.125: RN13.3 34.75,11.85 35,12.1 U1.137
CPU_LCD_D15: length 2
  TOP w0.125: RN13.4 34.25,11.85 34.6,12.2 U1.136
CPU_LCD_D18: length 2.1
  TOP w0.125: U1.135 34.2,12.3 33.45,11.55 RN14.1
CPU_LCD_D19: length 2.4
  TOP w0.125: U1.134 33.8,12.3 33.5,12 33.1,12 32.95,11.85 RN14.2
CPU_LCD_D20: length 2.5
  TOP w0.125: U1.133 33.4,12.4 33.3,12.3 32.9,12.3 32.45,11.85 RN14.3
CPU_LCD_D21: length 5.4
  TOP w0.125: RN14.4 31.95,12.05 31.6,12.4 31.6,13.8 30.4,15 30.4,15.3 30.5,15.4 U1.132
CPU_LCD_D22: length 5.8
  TOP w0.125: U1.131 30.4,15.8 30.1,15.5 30.1,14.8 31.12,13.78 RN15.1
CPU_LCD_D23: length 6.2
  TOP w0.125: RN15.2 30.62,13.78 29.8,14.6 29.8,15.6 30.4,16.2 U1.130
CPU_LCD_DE: length 7.1
  TOP w0.125: RN15.4 29.62,13.78 29.2,14.2 29.2,15.8 30.4,17 U1.128
CPU_LCD_HSYNC: length 12.7
  TOP w0.125: U1.127 30.4,17.4 28.9,15.9 28.9,14 29.2,13.7 29.2,9.6 31.2,7.6 R36.1
CPU_LCD_VSYNC: length 12.9
  TOP w0.125: R37.1 30.2,8.1 28.9,9.4 28.9,13.6 28.6,13.9 28.6,16 30.4,17.8 U1.126
CSI_D0: length 14.3
  TOP w0.125: RN17.5 25.51,14.09 25.7,13.9 25.7,8.5 22.5,5.3 21.5,5.3 21.2,5 20.2,5 20,4.8 J1.20
CSI_D1: length 15.8
  TOP w0.125: RN17.6 26.01,8.41 22.6,5 21.6,5 21,4.4 21,3 J1.19
CSI_D2: length 12.6
  TOP w0.125: RN17.7 26.51,14.21 26.3,14 26.3,8.3 J1.22
CSI_D3: length 14.8
  TOP w0.125: J1.21 23,3 23,4.6 26.6,8.2 26.6,13.9 27.01,14.31 RN17.8
CSI_D4: length 8.9
  TOP w0.125: RN16.5 26.95,8.15 24,5.2 J1.24
CSI_D5: length 11.1
  TOP w0.125: J1.23 25,3 25,5.8 27.45,8.25 RN16.6
CSI_D6: length 8.5
  TOP w0.125: J1.26 26,6.4 27.95,8.35 RN16.7
CSI_D7: length 10.7
  TOP w0.125: RN16.8 28.45,8.45 27,7 27,3 J1.25
CSI_HSYNC: length 12.1
  TOP w0.125: RN18.7 24.81,11.2 25,11.01 25,8.6 22.3,5.9 21.3,5.9 21,5.6 19.6,5.6 J1.18
CSI_MCLK: length 15.5
  TOP w0.125: J1.15 17,3 17,4.4 17.6,5 18.6,5 19.5,5.9 20.9,5.9 21.2,6.2 22.2,6.2 24.7,8.7 24.7,10.9 24.31,11.29 RN18.6
CSI_PCLK: length 13.5
  TOP w0.125: J1.16 16.2,4 17.5,5.3 18.5,5.3 19.4,6.2 20.8,6.2 21.1,6.5 22.1,6.5 24.4,8.8 24.4,10.8 23.81,11.39 RN18.5
CSI_PWR_EN: length 49.6
  TOP w0.125: J1.4 4,5.1 4.2,5.3 ; 4.2,5.3 4.01,5.49 R41.2 ; 4.2,5.3 8.4,5.3 9,5.9 10.5,5.9 11.1,6.5 12,6.5 12.3,6.8 14.6,6.8 14.9,7.1 16.1,7.1 16.7,7.7 17.7,7.7 18.6,8.6 20,8.6 20.9,9.5 20.9,11.2 21.3,11.6 21.3,14.3 21.7,14.7 21.7,17.6 23.9,19.8 23.9,22.9 v1(24,23) ; U4.5 12.9,27.2 14.1,26 v1(21.2,26)
  BOTTOM w0.125: v1(24,23) 23.6,23.4 23.1,23.4 21.5,25 21.5,25.7 v1(21.2,26)
CSI_RST: length 51.5
  TOP w0.125: v1(21.9,25.4) 21.8,25.3 20.5,25.3 19.5,24.3 14.3,24.3 13.5,25.1 13.5,25.8 12.9,26.4 U4.3 ; v1(24.2,23.7) 24.4,23.5 24.4,22.8 24.2,22.6 24.2,19.7 22,17.5 22,14.6 21.6,14.2 21.6,11.5 21.2,11.1 21.2,9.4 20.1,8.3 18.7,8.3 17.8,7.4 16.8,7.4 16.2,6.8 15,6.8 14.7,6.5 12.4,6.5 12.1,6.2 11.2,6.2 10.6,5.6 9.1,5.6 8.5,5 5.4,5 5,4.6 5,3 J1.3
  BOTTOM w0.125: v1(21.9,25.4) 21.9,25 23.2,23.7 v1(24.2,23.7)
